# Altium PCB TIDA-010954-RevB.PcbDoc (part 1 of 8)
Units mm, origin at the board's own origin, x right, y up, seen from the top; angles counter-clockwise.
Board outline 290 x 100 mm, 6 copper layers (Top Layer, Mid1, Mid2, Mid3, Mid4, Bottom Layer), stack 1.59 mm thick; 394 components, 204 nets, 1137 pads, 2188 vias.
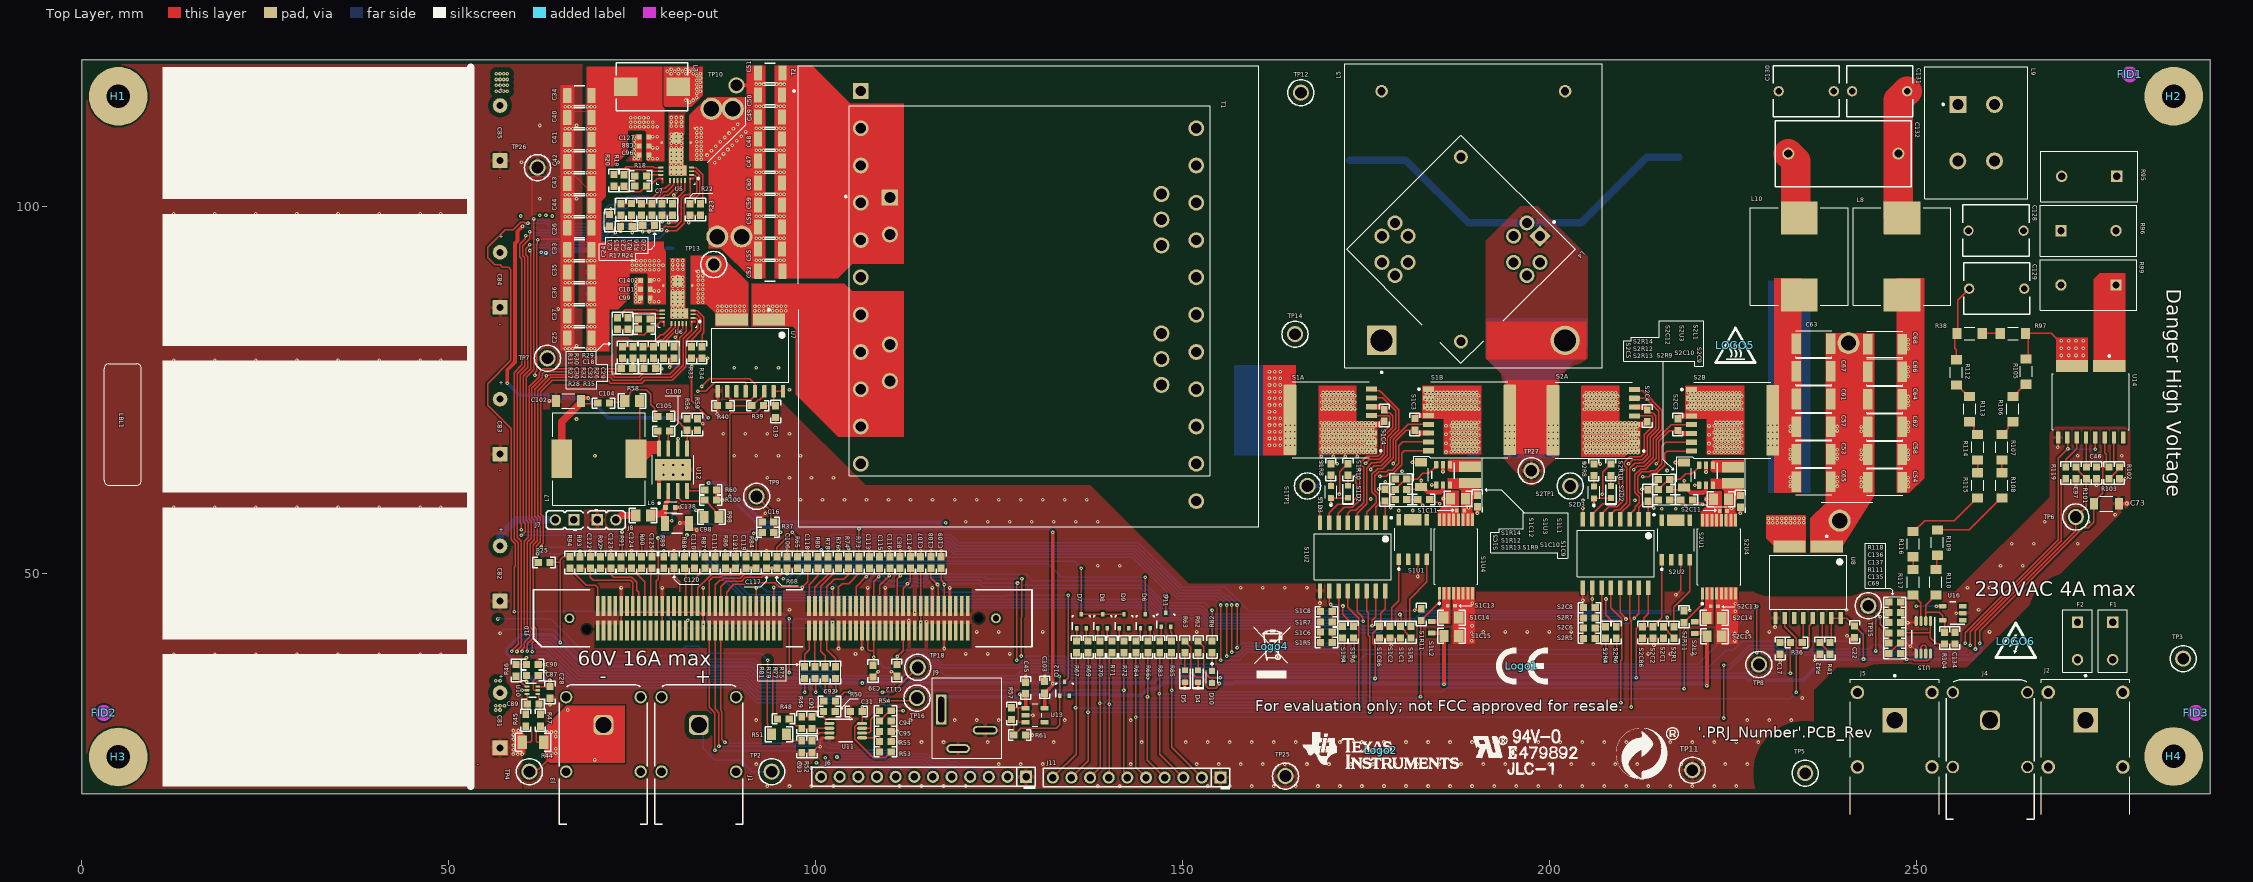
[diagram p0: Top Layer view]
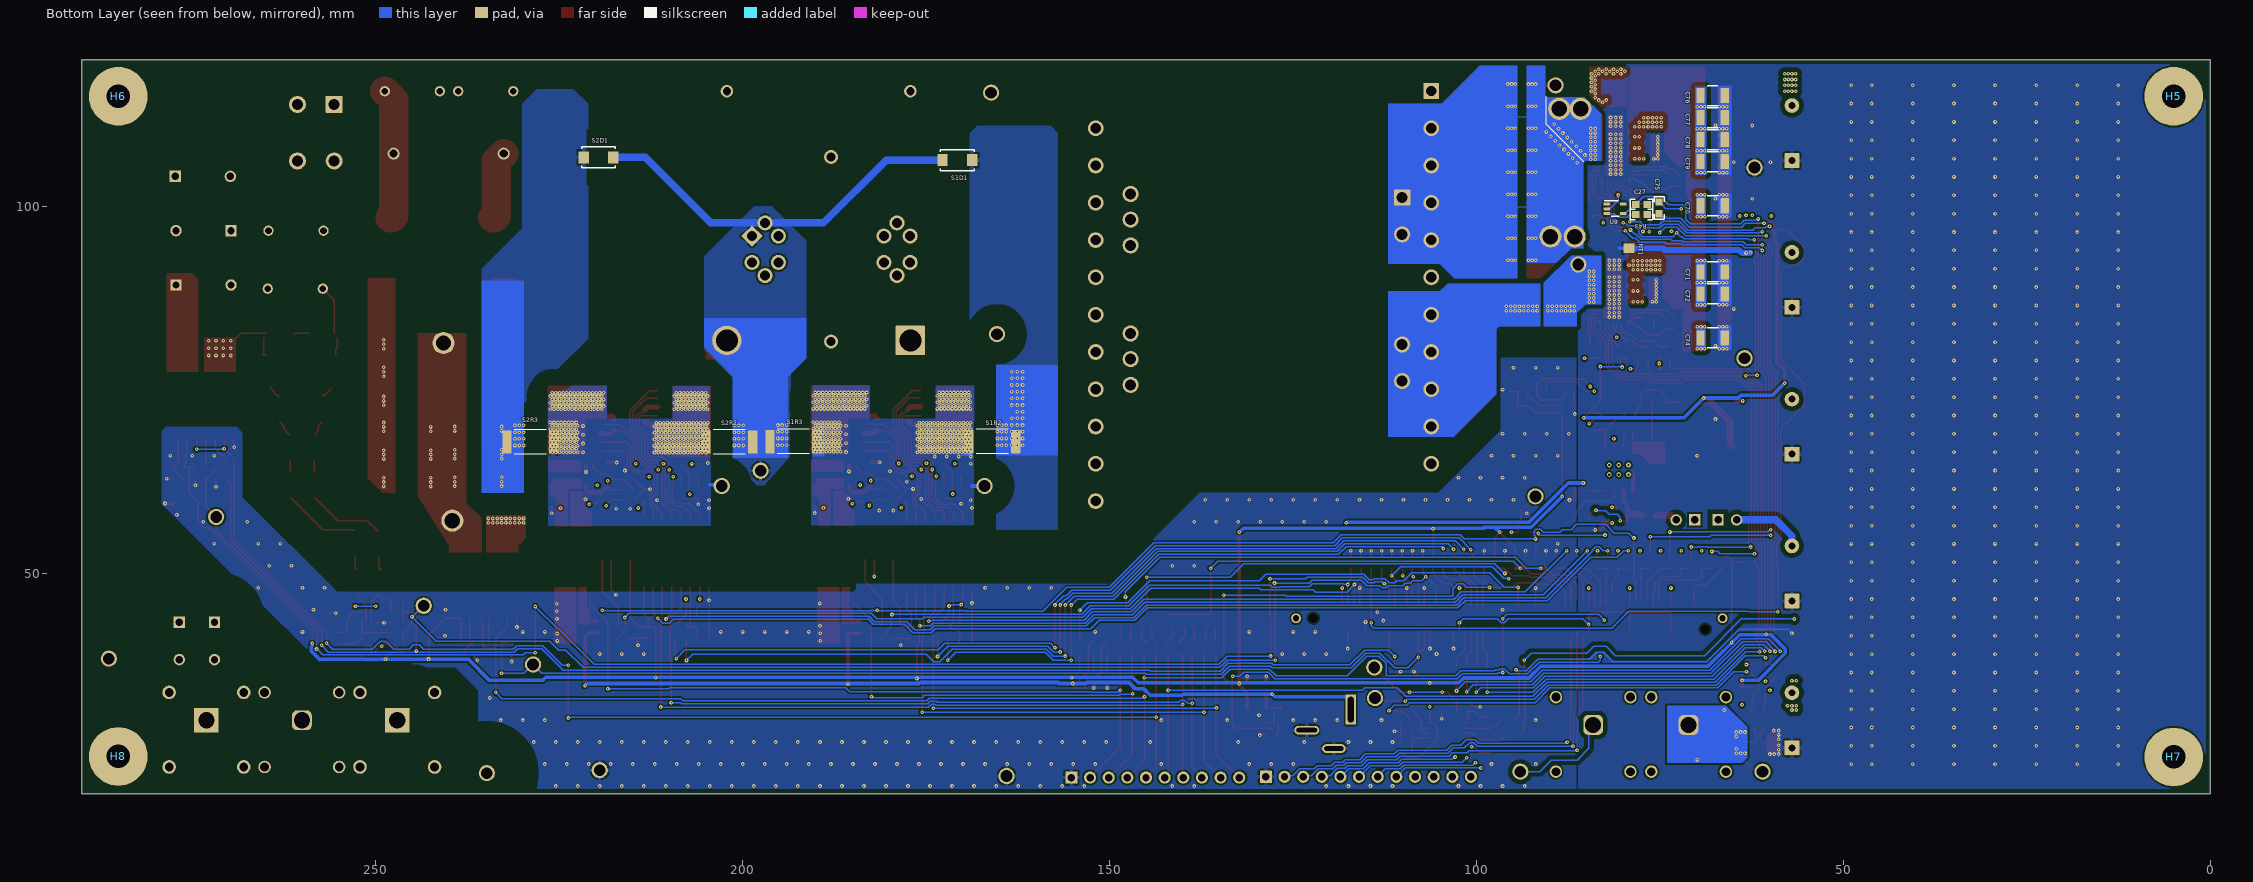
[diagram p1: Bottom Layer view, seen from below]
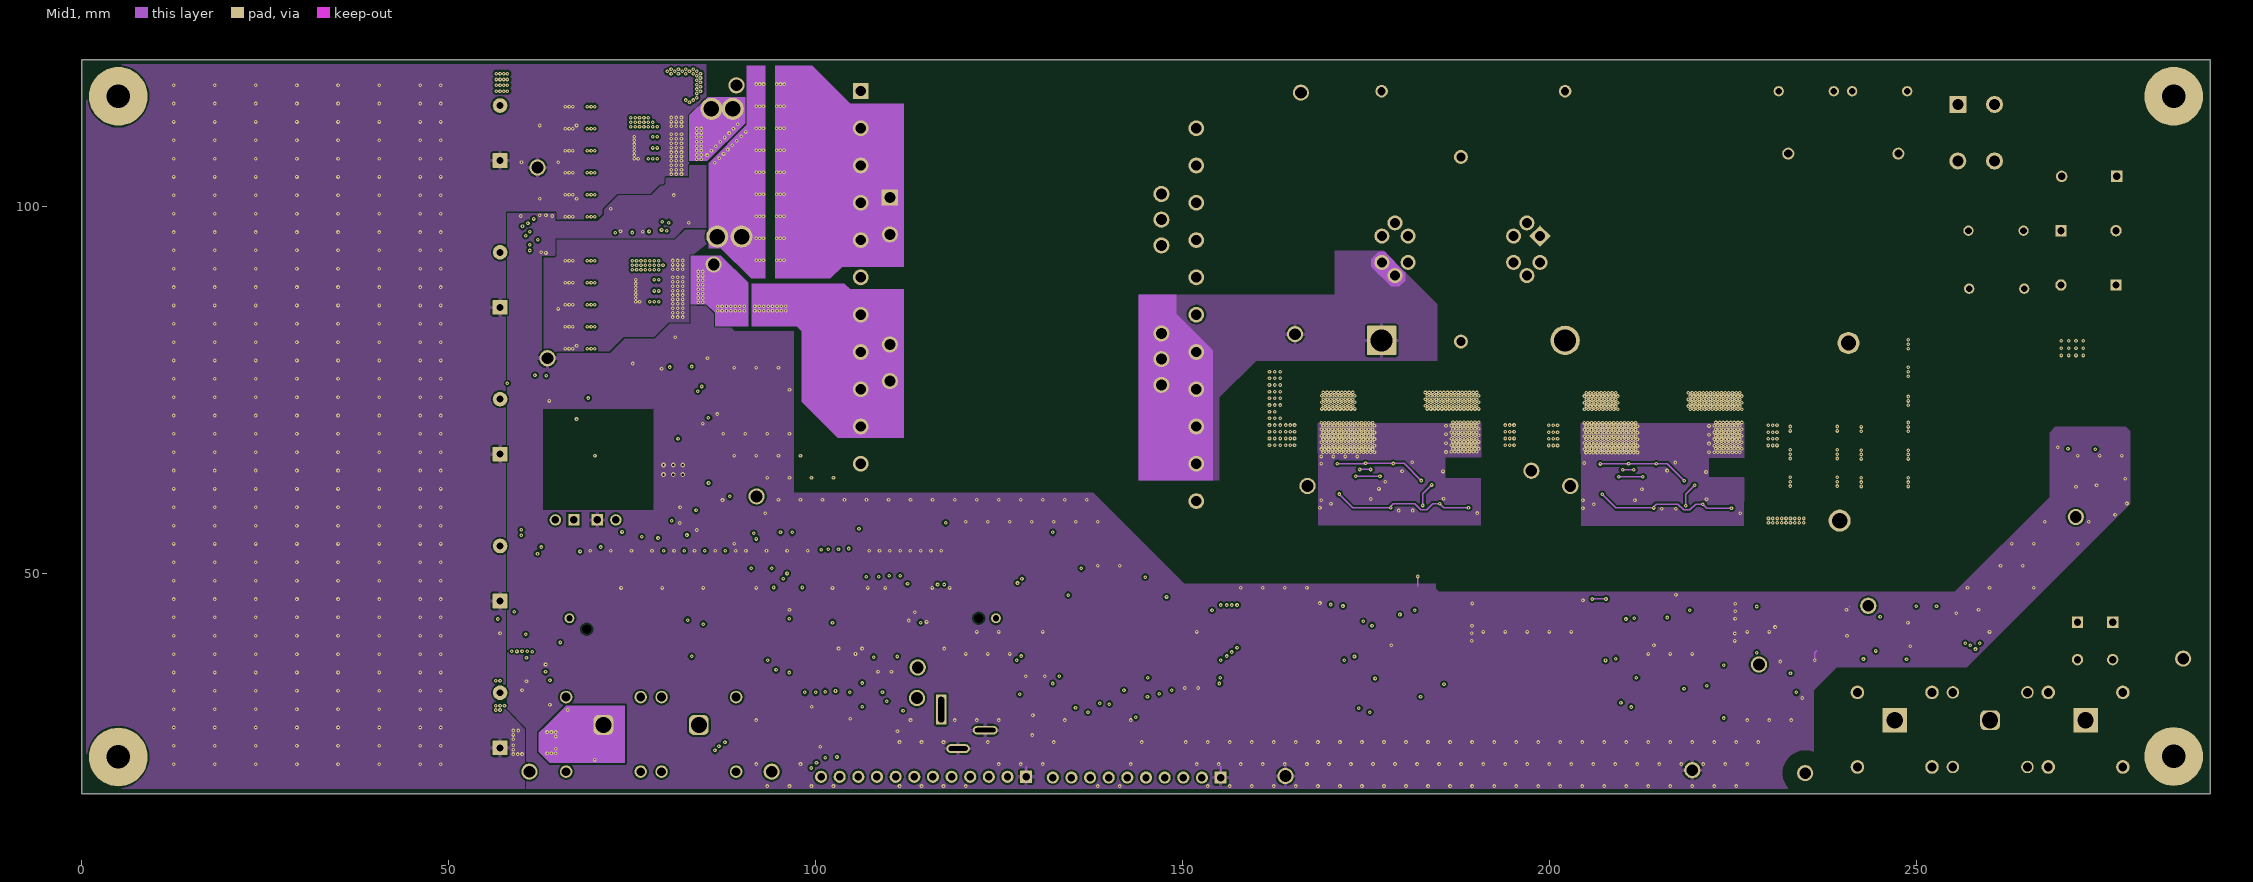
[diagram p2: Mid1]
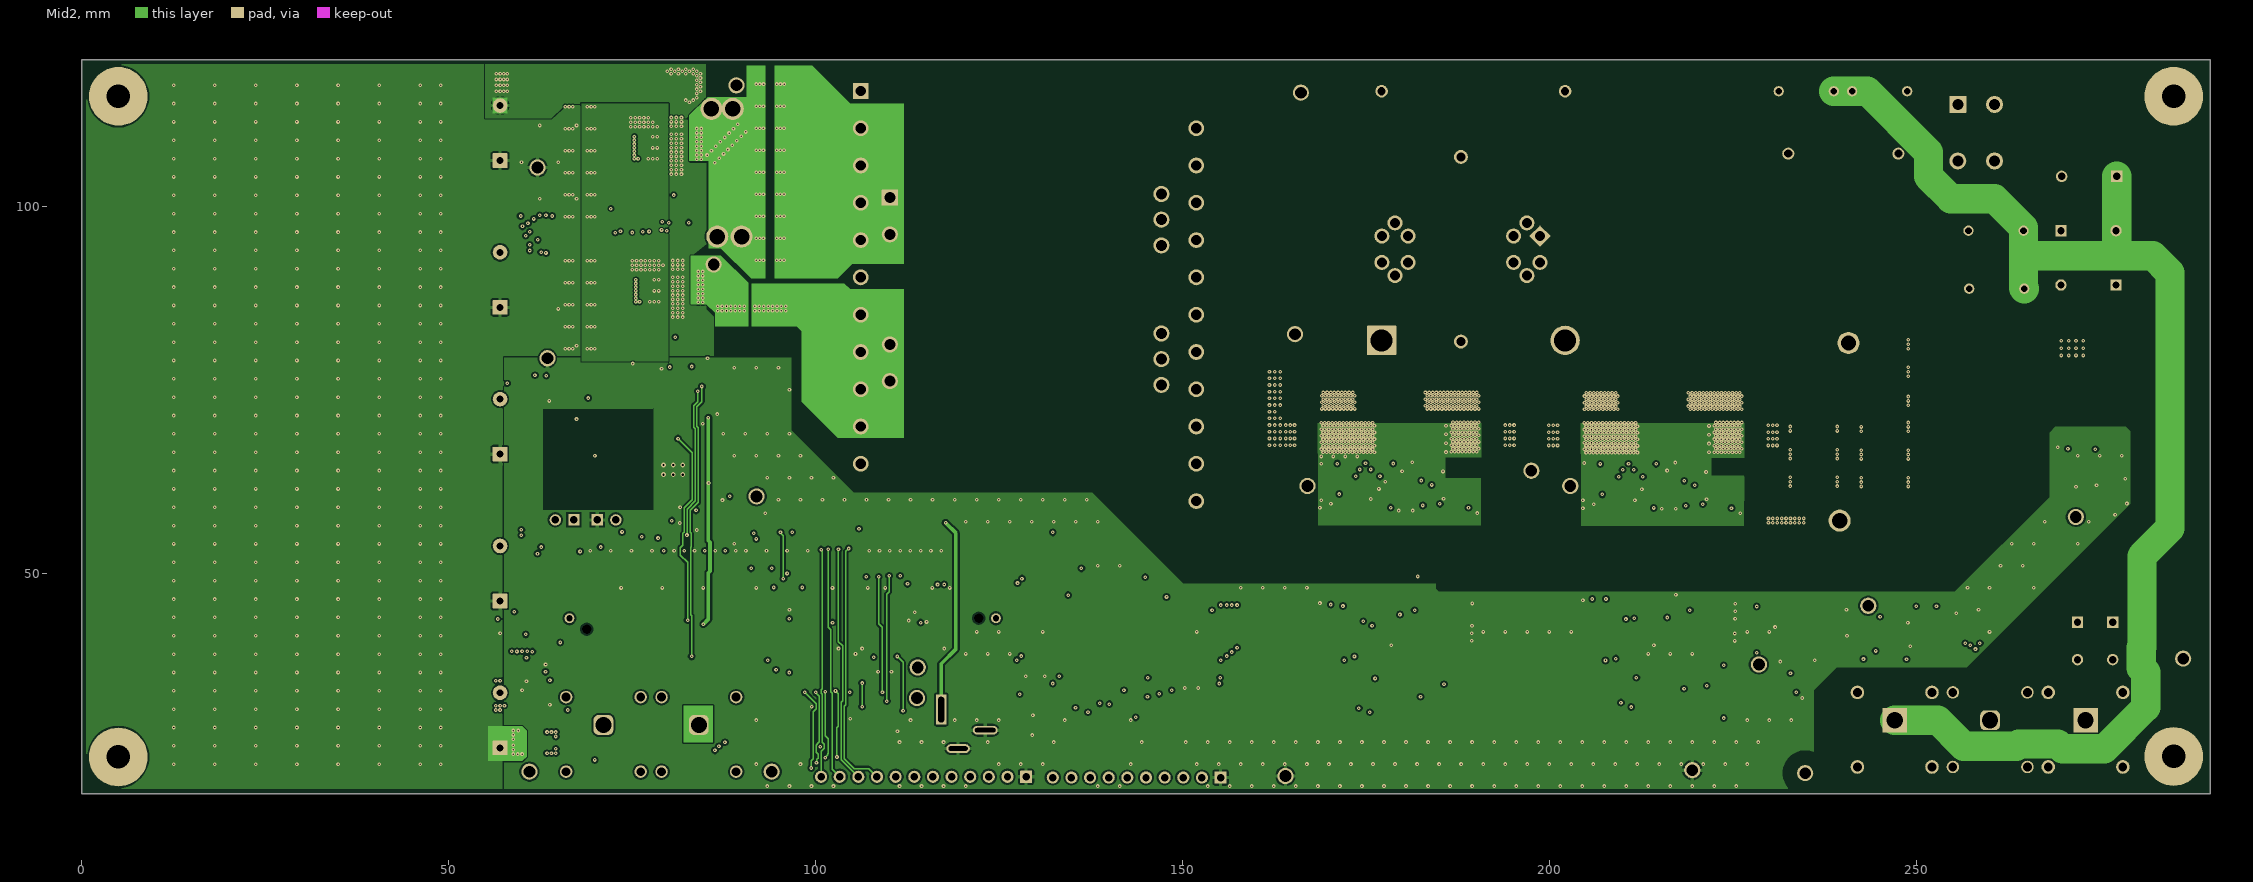
[diagram p3: Mid2]
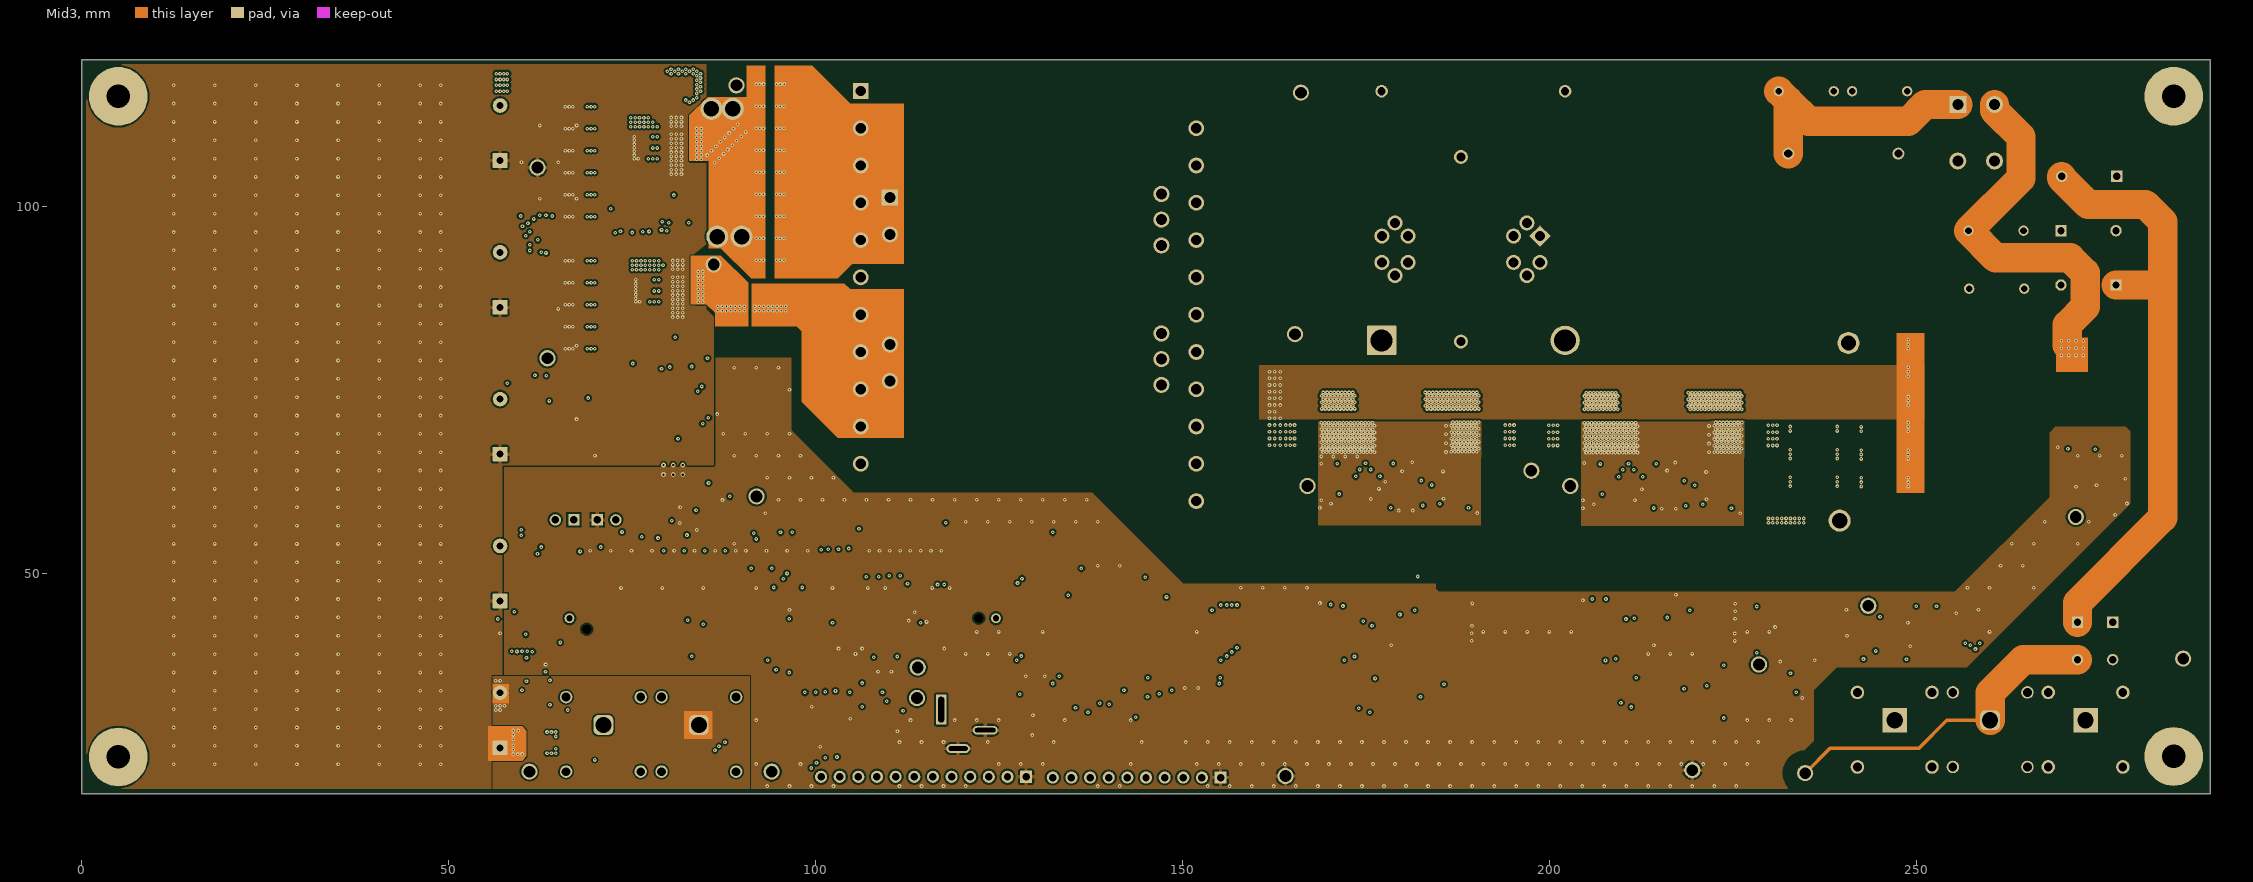
[diagram p4: Mid3]
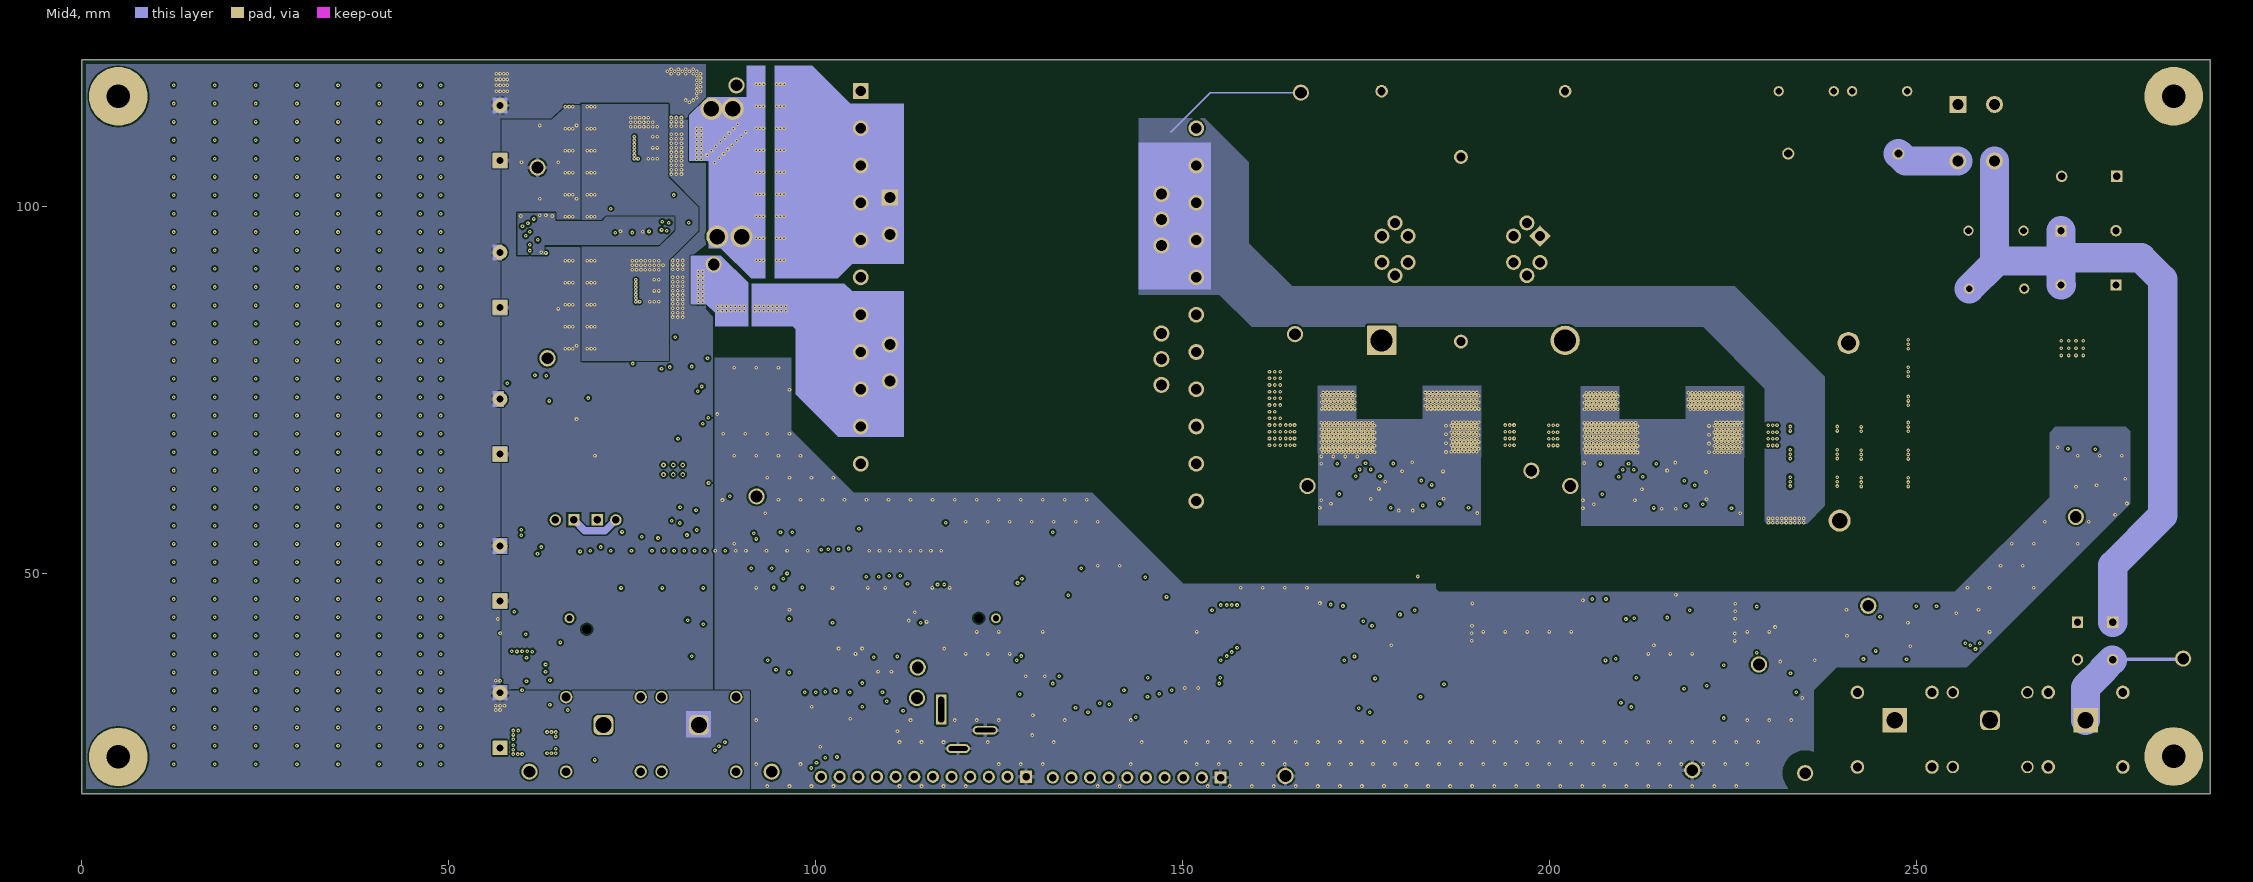
[diagram p5: Mid4]
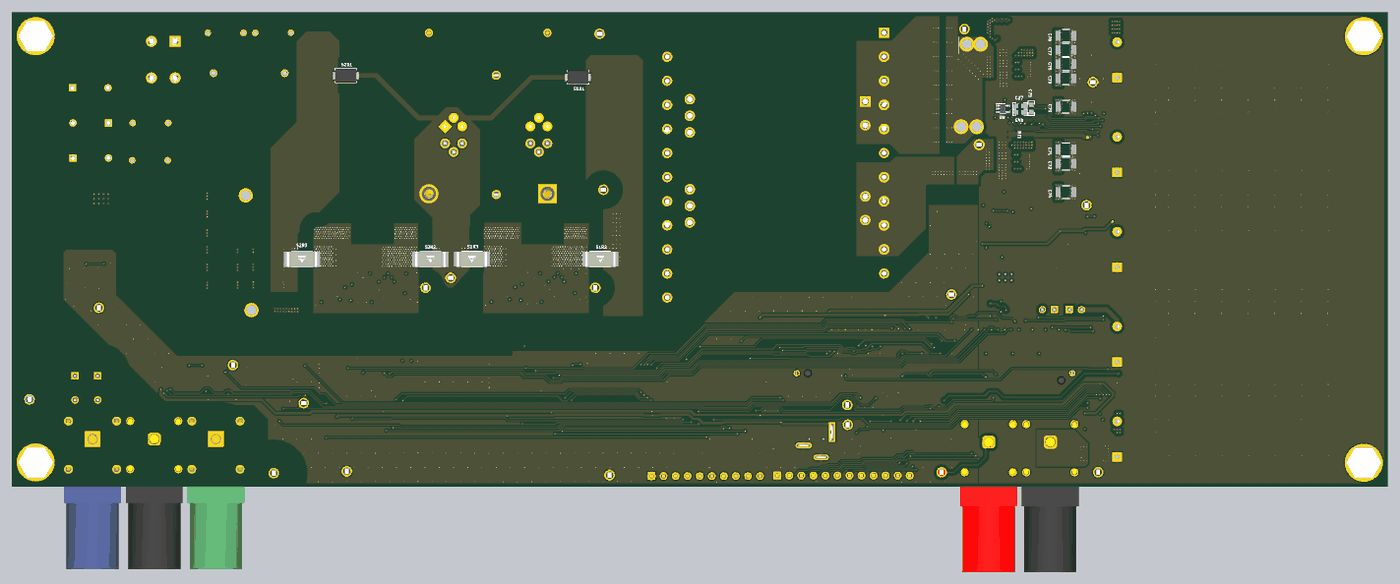
[diagram p11: 3D render of the assembled board from below, using the file's embedded part models]

## Layer stack, top to bottom
Top Solder: solder mask 0.0102, Solder Resist, Dk 3.5
Top Layer: signal copper 0.07
Dielectric 1: prepreg 0.084, PP-010, Dk 4
Dielectric 3: prepreg 0.0535, PP-006, Dk 4.1
Mid1: signal copper 0.061
Core1: core 0.35, Core-032, Dk 4.7
Mid2: signal copper 0.061
Dielectric 5: prepreg 0.0535, PP-006, Dk 4.1
Prepreg: core 0.124, FR-4 High Tg, Dk 4.8
Dielectric 7: prepreg 0.0535, PP-006, Dk 4.1
Mid3: signal copper 0.061
Core2: core 0.35, Core-032, Dk 4.7
Mid4: signal copper 0.061
Dielectric 4: prepreg 0.0535, PP-006, Dk 4.1
Dielectric 2: prepreg 0.084, PP-010, Dk 4
Bottom Layer: signal copper 0.07
Bottom Solder: solder mask 0.0102, Solder Resist, Dk 3.5

## Board outline
0,20 290,20 290,120 0,120

## Design rules (kind name [scope] priority, off if disabled: settings)
AcuteAngle [All] p1: minimum=4.50000000000000E+0001 checktracksonly=FALSE
AssemblyTestPointUsage [All] p1: valid=2
BoardOutlineClearance BoardOutlineClearance_MountingHoles [OnCopper and InComponentClass('Mounting Holes')] p1: gap=0.8 ignorepadtopadclearanceinfootprint=FALSE
BoardOutlineClearance BoardOutlineClearance_Poly [OnCopper and IsPoly] p2: gap=0.635 ignorepadtopadclearanceinfootprint=FALSE
BoardOutlineClearance BoardOutlineClearance_Via [IsVia] p3: gap=0.6 ignorepadtopadclearanceinfootprint=FALSE
BoardOutlineClearance [OnCopper and Not InComponentClass('Logo') and not InComponentClass('FiducialMark') and not InRegion(1000,500,4000,800) and not InPoly] p4: gap=0.8 ignorepadtopadclearanceinfootprint=FALSE
Clearance Clearance_Iso_Int [InNetClass('LV') AND NOT (OnOutside OR OnMultiLayer ) vs NOT InNetClass('LV') AND NOT (OnTopLayer OR OnBottomLayer) AND InAnyNet AND NOT InNetClass('VAC_MEASURE')] p1: gap=2 ignorepadtopadclearanceinfootprint=TRUE
Clearance Clearance_Iso_Ext [InNetClass('LV') AND (OnOutside OR OnMultiLayer) vs NOT InNetClass('LV') AND (OnTopLayer OR OnBottomLayer OR OnMultiLayer) AND InAnyNet AND NOT InNetClass('VAC_MEASURE') AND NOT WithinRoom('SmallerClearance1') AND NOT WithinRoom('SmallerClearance2')] p2: gap=6 ignorepadtopadclearanceinfootprint=TRUE
Clearance Clearance_Keepouts [((IsTrack Or IsArc) And Not InPoly) And IsFree and IsKeepOut vs ((IsTrack Or IsArc) And Not InPoly) And IsFree and IsKeepOut] p3: gap=0 ignorepadtopadclearanceinfootprint=FALSE
Clearance Clearance_S2_Int [InNetClass('S2_Nets') AND NOT InNetClass('LV') AND NOT (OnOutside OR OnMultiLayer ) vs NOT InNetClass('S2_Nets') AND NOT (OnTopLayer OR OnBottomLayer) AND InAnyNet] p4: gap=0.3 ignorepadtopadclearanceinfootprint=TRUE
Clearance Clearance_S1_Int [InNetClass('S1_Nets') AND NOT InNetClass('LV') AND NOT (OnOutside OR OnMultiLayer ) vs NOT InNetClass('S1_Nets') AND NOT (OnTopLayer OR OnBottomLayer) AND InAnyNet] p5: gap=0.3 ignorepadtopadclearanceinfootprint=TRUE
Clearance Clearance_HV_SW3_Int [InNetClass('HV_SW3') AND NOT (OnOutside OR OnMultiLayer ) vs NOT InNetClass('HV_SW3') AND NOT (OnTopLayer OR OnBottomLayer)  AND InAnyNet] p6: gap=0.3 ignorepadtopadclearanceinfootprint=TRUE
Clearance Clearance_HV_SW2_Int [InNetClass('HV_SW2') AND NOT (OnOutside OR OnMultiLayer ) vs NOT InNetClass('HV_SW2') AND NOT (OnTopLayer OR OnBottomLayer) AND InAnyNet] p7: gap=0.3 ignorepadtopadclearanceinfootprint=TRUE
Clearance Clearance_HV_SW1_Int [InNetClass('HV_SW1') AND NOT (OnOutside OR OnMultiLayer ) vs NOT InNetClass('HV_SW1') AND NOT (OnTopLayer OR OnBottomLayer) AND InAnyNet] p8: gap=0.3 ignorepadtopadclearanceinfootprint=TRUE
Clearance Clearance_HV_L_Int [InNetClass('HV_L') AND NOT (OnOutside OR OnMultiLayer ) vs NOT InNetClass('HV_L') AND NOT (OnTopLayer OR OnBottomLayer) AND InAnyNet] p9: gap=0.3 ignorepadtopadclearanceinfootprint=TRUE
Clearance Clearance_HV_N_Int [InNetClass('HV_N') AND NOT (OnOutside OR OnMultiLayer ) vs NOT InNetClass('HV_N') AND NOT (OnTopLayer OR OnBottomLayer) AND InAnyNet] p10: gap=0.3 ignorepadtopadclearanceinfootprint=TRUE
Clearance Clearance_S2_Ext [InNetClass('S2_Nets') AND NOT InNetClass('LV') AND (OnOutside OR OnMultiLayer) vs NOT InNetClass('S2_Nets' ) AND (OnTopLayer OR OnBottomLayer OR OnMultiLayer)  AND InAnyNet] p11: gap=3 ignorepadtopadclearanceinfootprint=TRUE
Clearance Clearance_S1_Ext [InNetClass('S2_Nets') AND NOT InNetClass('LV') AND (OnOutside OR OnMultiLayer) vs NOT InNetClass('S2_Nets') AND (OnTopLayer OR OnBottomLayer OR OnMultiLayer) AND InAnyNet] p12: gap=3 ignorepadtopadclearanceinfootprint=TRUE
Clearance Clearance_HV_SW3_Ext [InNetClass('HV_SW3') AND (OnOutside OR OnMultiLayer) vs NOT InNetClass('HV_SW3') AND (OnTopLayer OR OnBottomLayer OR OnMultiLayer) AND InAnyNet  AND NOT WithinRoom('SmallerClearance4')] p13: gap=3 ignorepadtopadclearanceinfootprint=TRUE
Clearance Clearance_HV_SW2_Ext [InNetClass('HV_SW2') AND (OnOutside OR OnMultiLayer) vs NOT InNetClass('HV_SW2') AND (OnTopLayer OR OnBottomLayer OR OnMultiLayer)  AND InAnyNet] p14: gap=3 ignorepadtopadclearanceinfootprint=TRUE
Clearance Clearance_HV_SW1_Ext [InNetClass('HV_SW1') AND (OnOutside OR OnMultiLayer) vs NOT InNetClass('HV_SW1') AND (OnTopLayer OR OnBottomLayer OR OnMultiLayer) AND InAnyNet] p15: gap=3 ignorepadtopadclearanceinfootprint=TRUE
Clearance Clearance_HV_L_Ext [InNetClass('HV_L') AND (OnOutside OR OnMultiLayer) vs NOT InNetClass('HV_L') AND (OnTopLayer OR OnBottomLayer OR OnMultiLayer) AND InAnyNet AND NOT WithinRoom('SmallerClearance3') AND NOT WithinRoom('SmallerClearance4')] p16: gap=3 ignorepadtopadclearanceinfootprint=TRUE
Clearance Clearance_HV_N_Ext [InNetClass('HV_N') AND (OnOutside OR OnMultiLayer) vs NOT InNetClass('HV_N') AND (OnTopLayer OR OnBottomLayer OR OnMultiLayer) AND InAnyNet AND NOT WithinRoom('SmallerClearance3') AND NOT WithinRoom('SmallerClearance4')] p17: gap=3 ignorepadtopadclearanceinfootprint=TRUE
Clearance Clearance_MidV1_Int [InNetClass('MidV1') AND NOT (OnOutside OR OnMultiLayer ) vs NOT InNetClass('MidV1') AND NOT (OnTopLayer OR OnBottomLayer)] p18: gap=0.2 ignorepadtopadclearanceinfootprint=TRUE
Clearance Clearance_MidV2_Int [InNetClass('MidV2') AND NOT (OnOutside OR OnMultiLayer ) vs NOT InNetClass('MidV2') AND NOT (OnTopLayer OR OnBottomLayer)] p19: gap=0.2 ignorepadtopadclearanceinfootprint=TRUE
Clearance Clearance_MidV3_Int [InNetClass('MidV3') AND NOT (OnOutside OR OnMultiLayer ) vs NOT InNetClass('MidV3') AND NOT (OnTopLayer OR OnBottomLayer)] p20: gap=0.2 ignorepadtopadclearanceinfootprint=TRUE
Clearance Clearance_MidV4_Int [InNetClass('MidV4') AND NOT (OnOutside OR OnMultiLayer ) vs NOT InNetClass('MidV4') AND NOT (OnTopLayer OR OnBottomLayer)] p21: gap=0.2 ignorepadtopadclearanceinfootprint=TRUE
Clearance Clearance_MidV1_Ext [InNetClass('MidV1') AND (OnOutside OR OnMultiLayer) vs NOT InNetClass('MidV1' ) AND (OnTopLayer OR OnBottomLayer OR OnMultiLayer)] p22: gap=0.6 ignorepadtopadclearanceinfootprint=TRUE
Clearance Clearance_MidV2_Ext [InNetClass('MidV2') AND (OnOutside OR OnMultiLayer) vs NOT InNetClass('MidV2' ) AND (OnTopLayer OR OnBottomLayer OR OnMultiLayer)] p23: gap=0.6 ignorepadtopadclearanceinfootprint=TRUE
Clearance Clearance_MidV3_Ext [InNetClass('MidV3') AND (OnOutside OR OnMultiLayer) vs NOT InNetClass('MidV3' ) AND (OnTopLayer OR OnBottomLayer OR OnMultiLayer)] p24: gap=0.6 ignorepadtopadclearanceinfootprint=TRUE
Clearance Clearance_MidV4_Ext [InNetClass('MidV4') AND (OnOutside OR OnMultiLayer) vs NOT InNetClass('MidV4' ) AND (OnTopLayer OR OnBottomLayer OR OnMultiLayer)] p25: gap=0.6 ignorepadtopadclearanceinfootprint=TRUE
Clearance Clearance_Poly [InPolygon] p26: gap=0.25 ignorepadtopadclearanceinfootprint=TRUE
Clearance Clearance_FiducialMark [IsKeepOut and InComponentClass('FiducialMark') vs IsPad and InComponentClass('FiducialMark')] p27: gap=0 ignorepadtopadclearanceinfootprint=FALSE
Clearance Clearance_Int [NOT (OnOutside OR OnMultiLayer)] p28: gap=0.2 ignorepadtopadclearanceinfootprint=TRUE
Clearance Clearance_Ext [All] p29: gap=0.2 ignorepadtopadclearanceinfootprint=TRUE
Clearance [All] p30: gap=0.2 ignorepadtopadclearanceinfootprint=TRUE
ComponentClearance ComponentClearance_Magnetics [InComponent('T1') OR InComponent('T2') vs InComponent('T1') OR InComponent('T2')] p1: gap=-100 collisioncheckmode=3 verticalgap=0.254 showdistances=FALSE
ComponentClearance ComponentClearance_Magnetics_2 [InComponent('L4') OR InComponent('L5') vs InComponent('L4') OR InComponent('L5')] p2: gap=-100 collisioncheckmode=3 verticalgap=0.254 showdistances=FALSE
ComponentClearance ComponentClearance_MountingHoles_FiducialMarks [InComponentClass('Mounting Holes') vs InComponentClass('FiducialMark')] p3: gap=1.27 collisioncheckmode=3 verticalgap=0.254 showdistances=FALSE
ComponentClearance ComponentClearance_Shunt [InComponentClass('Header') vs InComponentClass('Shunt')] p4: gap=0 collisioncheckmode=3 verticalgap=0 showdistances=FALSE
ComponentClearance ComponentClearance_Logo [InComponentClass('Logo')] p5: gap=0.762 collisioncheckmode=3 verticalgap=0.254 showdistances=FALSE
ComponentClearance ComponentClearance_ScrewToNut [(HasFootprint('NY PMS 440 0025 PH')) vs (HasFootprint('Keystone_1902C'))] p6: gap=0.127 collisioncheckmode=3 verticalgap=0.254 showdistances=FALSE
ComponentClearance ComponentClearance_MountingHoles [InComponentClass('Mounting Holes')] p7: gap=2.54 collisioncheckmode=3 verticalgap=2540 showdistances=FALSE
ComponentClearance ComponentClearance_SmallPassives [HasFootprint('0201*') or HasFootprint('0402*') or HasFootprint('0508') or HasFootprint('*0603*') or HasFootprint('0612') or HasFootprint('0805*') or HasFootprint('0815*') or HasFootprint('0830*') or HasFootprint('1206*') or HasFootprint('1210*') or HasFootprint('1808*') or HasFootprint('1812*') or HasFootprint('1825*') or HasFootprint('2010*') or HasFootprint('2220*') or HasFootprint('2225*') or HasFootprint('2512*') or HasFootprint('2728*') or HasFootprint('3518*') vs HasFootprint('0201*') or HasFootprint('0402*') or HasFootprint('0508') or HasFootprint('*0603*') or HasFootprint('0612') or HasFootprint('0805*') or HasFootprint('0815*') or HasFootprint('0830*') or HasFootprint('1206*') or HasFootprint('1210*') or HasFootprint('1808*') or HasFootprint('1812*') or HasFootprint('1825*') or HasFootprint('2010*') or HasFootprint('2220*') or HasFootprint('2225*') or HasFootprint('2512*') or HasFootprint('2728*') or HasFootprint('3518*')] p8: gap=0.38 collisioncheckmode=3 verticalgap=0.254 showdistances=FALSE
ComponentClearance ComponentClearance_THtoSMT [IsThruComponent vs IsSMTComponent] p9: gap=0.762 collisioncheckmode=3 verticalgap=0.762 showdistances=FALSE
ComponentClearance ComponentClearance_THtoTH [IsThruComponent vs IsThruComponent] p10: gap=0.508 collisioncheckmode=3 verticalgap=0.762 showdistances=FALSE
ComponentClearance [All] p11: gap=0.5 collisioncheckmode=3 verticalgap=0.254 showdistances=FALSE
DiffPairsRouting [All] p1: maxlimit=2.54 minlimit=0.254 mostfreqgap=0.254 toplayer_minwidth=0.381 toplayer_maxwidth=0.381 toplayer_prefwidth=0.381 midlayer1_minwidth=0.381 midlayer1_maxwidth=0.381 midlayer1_prefwidth=0.381 midlayer2_minwidth=0.381 midlayer2_maxwidth=0.381 midlayer2_prefwidth=0.381 midlayer3_minwidth=0.381 midlayer3_maxwidth=0.381 midlayer3_prefwidth=0.381 midlayer4_minwidth=0.381 midlayer4_maxwidth=0.381 midlayer4_prefwidth=0.381 bottomlayer_minwidth=0.381 bottomlayer_maxwidth=0.381 bottomlayer_prefwidth=0.381 maxuncoupledlength=25.4
FabricationTestPointUsage TestPointUsage [All] p1: valid=2 allowmultiple=FALSE
FabricationTestpoint Testpoint [All] p1: side=3 testpointundercomponent=TRUE minsize=1.016 maxsize=2.54 preferedsize=1.524 minholesize=0 maxholesize=1.016 preferedholesize=0.813 testpointgrid=0.025 allowsidetop=TRUE allowsidebottom=TRUE usegrid=TRUE gridtolerance=0
FanoutControl Fanout_LCC [IsLCC] p1: bgadir=Out bgaviamode=Centered fanoutstyle=Auto fanoutdirection=Alternating viagrid=0.025 // Fanout_LCC (Default Rule)
FanoutControl Fanout_BGA [IsBGA] p2: bgadir=Out bgaviamode=Centered fanoutstyle=Auto fanoutdirection=Alternating viagrid=0.025 // Fanout_BGA (Default Rule)
FanoutControl Fanout_Default [All] p4: bgadir=Out bgaviamode=Centered fanoutstyle=Auto fanoutdirection=Alternating viagrid=0.025 // Fanout_Default (Default Rule)
FanoutControl Fanout_Small [(CompPinCount < 5)] p5: bgadir=Out bgaviamode=Centered fanoutstyle=Auto fanoutdirection=OutThenIn viagrid=0.025 // Fanout_Small (Default Rule)
Height [All] p1 off: minheight=0 maxheight=25.4 prefheight=12.7
HoleSize [All] p1: absolutevalues=TRUE maxlimit=6.375 minlimit=0.2 maxpercent=80.000 minpercent=20.000
MinimumAnnularRing MinimumAnnularRing_ThermalPadVias [IsVia and InAnyComponent] p1: minimumring=0.15
MinimumAnnularRing MinimumAnnularRing_Vias [IsVia] p2: minimumring=0.15
MinimumAnnularRing [All] p3: minimumring=0.2
MinimumSolderMaskSliver MinimumSolderMaskSliver_Logo [InComponentClass('Logo') vs InComponentClass('Logo')] p1: minsoldermaskwidth=0.018
MinimumSolderMaskSliver [All] p2: minsoldermaskwidth=0.1
PlaneConnect [All] p1: pad.planeconnectstyle=Relief pad.reliefexpansion=0.254 pad.reliefentries=4 pad.reliefconductorwidth=0.5 pad.reliefairgap=0.254 via.planeconnectstyle=Relief via.reliefexpansion=0.254 via.reliefentries=4 via.reliefconductorwidth=0.254 via.reliefairgap=0.254
PolygonConnect [All] p1: thpad.connectstyle=Relief thpad.reliefconductorwidth=0.5 thpad.reliefentries=4 thpad.polygonreliefangle="90 Angle" thpad.airgapwidth=0.254 smdpad.connectstyle=Relief smdpad.reliefconductorwidth=0.5 smdpad.reliefentries=4 smdpad.polygonreliefangle="90 Angle" smdpad.airgapwidth=0.254 via.connectstyle=Direct via.reliefconductorwidth=0.254 via.reliefentries=4 via.polygonreliefangle="90 Angle" via.airgapwidth=0.254
RoomDefinition SmallerClearance1 [InComponentClass('FiducialMark')] p1 off: confinementstyle=ConfineIn formatcopy=TRUE lockcomponents=FALSE outline 190.8,63.254 173.2,63.254 173.2,45.646 190.8,45.646
RoomDefinition SmallerClearance3 [InComponentClass('Logo')] p2 off: confinementstyle=ConfineIn formatcopy=TRUE lockcomponents=FALSE outline 253.2,84.3 269.2,84.3 269.2,80.9 253.2,80.9
RoomDefinition SmallerClearance2 [InComponentClass('Mounting Holes')] p3 off: confinementstyle=ConfineIn formatcopy=TRUE lockcomponents=FALSE outline 226.6,63.208 209,63.208 209,45.6 226.6,45.6
RoomDefinition SmallerClearance4 [False] p4 off: confinementstyle=ConfineIn formatcopy=TRUE lockcomponents=FALSE outline 223.2,110.5 166.8,110.5 166.8,102.8 223.2,102.8
RoomDefinition S2 [InComponentClass('S2')] p5 off: confinementstyle=ConfineIn formatcopy=TRUE lockcomponents=FALSE outline 197.4,81 197.4,38 233.2,38 233.2,81
RoomDefinition S1 [InComponentClass('S1')] p6 off: confinementstyle=ConfineIn formatcopy=TRUE lockcomponents=FALSE outline 161.572,81.046 161.572,37.7 197.372,37.7 197.372,81.046
RoutingVias ThermalPadVias [IsVia and InAnyComponent] p1: holewidth=0.2 width=0.5 viastyle="Through Hole" minholewidth=0.2 minwidth=0.5 maxholewidth=0.5 maxwidth=0.8
RoutingVias [All] p2: holewidth=0.2 width=0.5 viastyle="Through Hole" minholewidth=0.2 minwidth=0.5 maxholewidth=1.016 maxwidth=1.651
SilkToBoardRegionClearance [Not ((IsComment or IsDesignator) And (Hide <> 'False')) and not InRegion(1000,500,4000,800)] p1:
SilkToSilkClearance SilkToSilkClearance_Pb-FreeLogo [(HasFootprint('Pb-Free_Overlay_Medium') OR HasFootprint('Pb-Free_Overlay_Small')) vs (HasFootprint('Pb-Free_Overlay_Medium') OR HasFootprint('Pb-Free_Overlay_Small'))] p1: silktosilkclearance=0
SilkToSilkClearance [All] p2: silktosilkclearance=0.1
SilkToSolderMaskClearance SilkToComponentPadClearance [(IsPad or IsFill or IsRegion) and InAnycomponent] p1: minsilkscreentomaskgap=0.1 clearancetoexposedcopper=TRUE
SilkToSolderMaskClearance "Silk to Solder Mask Opening" [All] p2: minsilkscreentomaskgap=0.1 clearancetoexposedcopper=FALSE
SolderMaskExpansion [All] p1: expansion=0.05 istentingtop=FALSE
SupplyNets "Schematic Supply Nets_4" [InNet('3V3')] p1: voltage=0.000
SupplyNets "Schematic Supply Nets_3" [InNet('GND')] p2: voltage=0.000
SupplyNets "Schematic Supply Nets_2" [InNet('PE')] p3: voltage=0.000
SupplyNets "Schematic Supply Nets_1" [InNet('5V')] p4: voltage=0.000
SupplyNets "Schematic Supply Nets" [InNet('PGND')] p5: voltage=0.000
UnRoutedNet [All] p1: checkbadconnections=TRUE
Width [All] p1: maxlimit=5 minlimit=0.2 preferedwidth=0.25
13 further rules are at their usual default settings.

## Classes and differential pairs
net class VAC_MEASURE: NetR105_2 NetR106_2 NetR107_2 NetR108_2 NetR109_2 NetR112_2 NetR113_2 NetR114_2 NetR115_2 NetR116_2
net class HV_SW1: T1_3
net class MidV3: DAB_POWER NetC98_2 NetC100_1 NetC100_2 NetJ7_1 PVIN
net class MidV1: LEG1_HS NetC7_1 NetR18_2 NetR19_1 NetR20_1 SW_L1 T1_1
net class MidV2: LEG2_HS NetC18_1 NetR29_2 NetR30_1 NetR31_1 SW_L2 T1_2
net class S2_Nets: NetS2C6_1 NetS2C8_1 NetS2C13_2 NetS2D2_1 NetS2D3_2 NetS2L1_1 NetS2R1_1 NetS2R9_1 NetS2R12_1 NetS2U1_2 NetS2U1_5 NetS2U1_6 NetS2U1_7 S2S_5V S2S_10V S2S_SRC S2SA_FLT S2SA_IN S2SA_Z S2SB_FLT S2SB_IN S2SB_Z
net class S1_Nets: NetS1C6_1 NetS1C8_1 NetS1C13_2 NetS1D2_1 NetS1D3_2 NetS1L1_1 NetS1R1_1 NetS1R9_1 NetS1R12_1 NetS1U1_2 NetS1U1_5 NetS1U1_6 NetS1U1_7 S1S_5V S1S_10V S1S_SRC S1SA_FLT S1SA_IN S1SA_Z S1SB_FLT S1SB_IN S1SB_Z
component class Output: C46 C69 C73 C97 C128 C129 C130 C131 C132 C134 C135 C136 C137 F1 F2 L8 L9 L10 R38 R95 R96 R97 R99 R101 R102 R103 R104 R105 R106 R107 R108 R109 R110 R111 R112 R113 R114 R115 R116 R117 R118 R119 TP6 TP11 TP15 U14 U15 U16
channel class TIDA-010954-ACSwitch: S1 S2
net class SW_SRC: NetD10_S1_1 NetD10_S2_1 NetR93_S1_1 NetR93_S2_1 NetS1D2_1 NetS1D3_2 NetS1L1_1 NetS1R9_1 NetS1R12_1 NetS2D2_1 NetS2D3_2 NetS2L1_1 NetS2R9_1 NetS2R12_1 NetU11_S1_5 NetU11_S1_6 NetU11_S1_7 NetU11_S2_5 NetU11_S2_6 NetU11_S2_7 S1S_5V S1S_10V S1S_SRC S1SA_FLT S1SA_IN S1SA_Z S1SB_FLT S1SB_IN S1SB_Z S2S_5V S2S_10V S2S_SRC S2SA_FLT S2SA_IN S2SA_Z S2SB_FLT S2SB_IN S2SB_Z
net class PE: PE
net class LV: 3V3 5V 5V_FLT 5V_GOOD AC_CS AC_CS_FLT AC_VS CS_FLT DAB_POWER DC_CS DC_VS F\A\U\L\T\ FB_TMP GND GPIO_DEBUG1 GPIO_DEBUG2 GPIO_DEBUG3 GPIO_WIRELESS1 GPIO_WIRELESS2 LED_RED LEG1_HS LEG2_HS NetC7_1 NetC18_1 NetC21_1 NetC23_1 NetC30_1 NetC32_1 NetC89_1 NetC89_2 NetC91_1 NetC91_2 NetC93_2 NetC95_2 NetC98_2 NetC100_1 NetC100_2 NetC104_2 NetC105_2 NetC110_1 NetC111_1 NetC120_1 NetC121_1 NetC122_1 NetC123_1 NetC124_1 NetC125_1 NetC134_1 NetC134_2 NetC136_1 NetD4_1 NetD5_1 NetD6_1 NetD6_2 NetD7_1 NetD7_2 NetD8_1 NetD8_2 NetD9_1 NetD10_1 NetD11_1 NetD11_2 NetJ7_1 NetJ10_1 NetJ10_2 NetJ10_3 NetJ10_4 NetJ10_5 NetJ10_6 NetJ10_8 NetJ10_12 NetJ10_14 NetJ10_15 NetJ10_18 NetJ10_20 NetJ10_21 NetJ10_26 NetJ10_27 NetJ10_28 NetJ10_30 NetJ10_32 NetJ10_37 NetJ10_40 NetJ10_41 NetJ10_42 NetJ10_43 NetJ10_44 NetJ10_45 NetJ10_49 NetJ10_50 NetJ10_51 NetJ10_52 NetJ10_53 NetJ10_54 NetJ10_55 NetJ10_56 NetJ10_57 NetJ10_58 NetJ10_60 NetJ10_61 NetJ10_62 NetJ10_63 NetJ10_64 NetJ10_66 NetJ10_67 NetJ10_68 NetJ10_69 NetJ10_70 NetJ10_71 NetJ10_72 NetJ10_73 NetJ10_74 NetJ10_76 NetJ10_86 NetJ10_88 NetJ10_90 NetJ10_92 NetJ10_93 NetJ10_95 NetJ10_109 NetJ10_113 NetJ10_114 NetJ10_115 NetJ10_116 NetJ10_117 NetJ10_118 NetJ10_119 NetJ10_120 NetJ12_1 NetJ13_3 NetJ13_4 NetJ13_8 NetR16_2 NetR18_2 NetR19_1 NetR20_1 NetR22_1 NetR23_1 NetR26_2 NetR29_2 NetR30_1 NetR31_1 NetR33_1 NetR34_1 NetR36_1 NetR37_1 NetR39_2 NetR41_2 NetR43_2 NetR46_2 NetR54_2 NetR60_2 NetR98_1 NetR101_2 NetR102_2 NetS1C6_1 NetS1C8_1 NetS1C13_2 NetS1R1_1 NetS2C6_1 NetS2C8_1 NetS2C13_2 NetS2R1_1 NetU4_2 NetU4_5 NetU15_6 PGND PRI_CS PVIN PVRTN PWR_FLT Q1_G Q1_ZVD Q2_G Q2_ZVD Q3_G Q3_ZVD Q4_G Q4_ZVD REF REF_TMCS S1_PWR_FLT S1_TMP S1A_FLT S1A_G S1A_ZVD S1B_FLT S1B_G S1B_ZVD S2_PWR_FLT S2_TMP S2A_FLT S2A_G S2A_ZVD S2B_FLT S2B_G S2B_ZVD S_PWR SEC_CS SPI_CLK SPI_COMM_CS SPI_MISO SPI_MOSI SW_L1 SW_L2 SWITCH_FLT T1_1 T1_2 UART_RX UART_TX XFMR_CS_FLT
net class HV: L_EXT N_EXT
net class HV_SW2: MidHV T1_4
net class HV_SW3: S2DA
net class HV_N: N_M NetC130_2 NetF2_1 S2DB
net class HV_L: L_M NetC131_1 S1DA
component class TIDA-010954-Top: J1 J2 J3 J4 J5 TP2 TP3 TP4 TP5
component class S2: S2A S2B S2C1 S2C2 S2C3 S2C4 S2C5 S2C6 S2C8 S2C9 S2C10 S2C11 S2C12 S2C13 S2C14 S2C15 S2C86 S2D1 S2D2 S2D3 S2L1 S2L2 S2R1 S2R2 S2R3 S2R4 S2R5 S2R6 S2R7 S2R8 S2R9 S2R10 S2R11 S2R12 S2R13 S2R14 S2TP1 S2U1 S2U2 S2U3 S2U4
component class S1: S1A S1B S1C1 S1C2 S1C3 S1C4 S1C5 S1C6 S1C8 S1C9 S1C10 S1C11 S1C12 S1C13 S1C14 S1C15 S1C86 S1D1 S1D2 S1D3 S1L1 S1L2 S1R1 S1R2 S1R3 S1R4 S1R5 S1R6 S1R7 S1R8 S1R9 S1R10 S1R11 S1R12 S1R13 S1R14 S1TP1 S1U1 S1U2 S1U3 S1U4
component class FB: C7 C18 C20 C21 C23 C24 C29 C30 C32 C88 C96 C99 C101 C127 C140 R15 R16 R17 R18 R19 R20 R21 R22 R23 R24 R25 R26 R27 R28 R29 R30 R31 R32 R33 R34 R35 U5 U6
component class Input: C28 C31 C81 C82 C83 C84 C85 C87 C89 C90 C91 C92 C93 C94 C95 R44 R45 R46 R47 R48 R49 R50 R51 R52 R53 R54 R55 TP16 TP18 U10 U11
component class Header: J6 J7 J8 J11
component class Power: C45 C98 C100 C102 C103 C104 C105 C138 D4 D5 J7 J8 J9 L6 L7 R56 R57 R58 R59 R60 R61 R62 R63 R98 R100 U12 U13
component class Cycloconverter: C16 C17 C19 C22 C25 C26 C27 C33 C34 C35 C36 C37 C40 C41 C42 C43 C44 C47 C48 C49 C50 C51 C52 C53 C54 C55 C56 C57 C58 C59 C60 C61 C62 C63 C64 C65 C66 C67 C68 C70 C71 C72 C74 C75 C76 C77 C78 C79 L3 L4 L5 NT1 R36 R37 R39 R40 R41 R42 R43 T1 T2 TP8 TP9 TP10 TP12 TP13 TP14 TP26 TP27 U7 U8 U9
component class Control: C38 C39 C106 C107 C108 C109 C110 C111 C112 C113 C114 C115 C116 C117 C118 C119 C120 C121 C122 C123 C124 C125 D6 D7 D8 D9 D10 D11 D12 J6 J10 J11 R64 R65 R66 R67 R68 R69 R70 R71 R72 R73 R74 R75 R76 R77 R78 R79 R80 R81 R82 R83 R84 R85 R86 R87 R88 R89 R90 R91 R92 R93 R94 TP7 TP25
component class "Mounting Holes": H1 H2 H3 H4
component class Logo: Logo2
component class HW: FID1 FID2 FID3 H1 H2 H3 H4 H5 H6 H7 H8 LBL1 Logo1 Logo2 Logo3 Logo4 LOGO5 LOGO6 ZZ1 ZZ2 ZZ3 ZZ4
component class FiducialMark: FID1 FID2 FID3
component class AssemblyNote: ZZ1 ZZ2 ZZ3 ZZ4
component class Label: LBL1

## Components (designator, comment, footprint, x,y, rotation, side; value= is the part's Value field where it differs from the comment)
C7 "CGA3E2X7R1E104K080AA" 0603 76.15,102.782 r0 top value=0.1uF
C16 "GRM1885C1H301JA01D" 0603 93.5,57 r180 top value=300pF
C17 "GRM1885C1H301JA01D" 0603 231.4,39.8 r270 top value=300pF
C18 "CGA3E2X7R1E104K080AA" 0603 76.65,83.3 r0 top value=0.1uF
C19 "CGA3E2X7R1E104K080AA" 0603 94.545,72.054 r270 top value=0.1uF
C20 "GRM185R61C105KE44D" 0603 80.5,99.582 r270 top value=1uF
C21 "GRM1885C1H101JA01D" 0603 73.45,99.582 r270 top value=100pF
C22 "CGA3E2X7R1E104K080AA" 0603 241.55,42.05 r270 top value=0.1uF
C23 "GRM1885C1H101JA01D" 0603 76.3,99.582 r270 top value=100pF
C24 "GRM1885C1H220JA01D" 0603 71.925,98.1 r270 top value=22pF
C25 "GRM32EC72A106KE05L" FP-GRM32EC72A106KE05L_1210-MFG 67.8,82.1 r0 top
C26 "GRM32EC72A106KE05L" FP-GRM32EC72A106KE05L_1210-MFG 67.8,97.1 r0 top
C27 "CGA3E2X7R1E104K080AA" 0603 77.5,100.298 r180 bottom value=0.1uF
C28 "CGA3E2X7R1E104K080AA" 0603 63.8,33.8 r270 top value=0.1uF
C29 "GRM185R61C105KE44D" 0603 80.7,80.1 r270 top value=1uF
C30 "GRM1885C1H101JA01D" 0603 75.1,80.1 r270 top value=100pF
C31 "CGA3E2X7R1E104K080AA" 0603 105.525,31.2 r0 top value=0.1uF
C32 "GRM1885C1H101JA01D" 0603 77.875,80.1 r270 top value=100pF
C33 "GRM32EC72A106KE05L" FP-GRM32EC72A106KE05L_1210-MFG 67.8,94.1 r0 top
C34 "GRM32EC72A106KE05L" FP-GRM32EC72A106KE05L_1210-MFG 67.8,115.1 r0 top
C35 "GRM32EC72A106KE05L" FP-GRM32EC72A106KE05L_1210-MFG 67.8,91.1 r0 top
C36 "GRM32EC72A106KE05L" FP-GRM32EC72A106KE05L_1210-MFG 67.8,88.1 r0 top
C37 "GRM32EC72A106KE05L" FP-GRM32EC72A106KE05L_1210-MFG 67.8,85.1 r0 top
C38 "GRM1885C1H301JA01D" 0603 111.5,51.5 r90 top value=300pF
C39 "GRM1885C1H301JA01D" 0603 107.8,36.7 r270 top value=300pF
C40 "GRM32EC72A106KE05L" FP-GRM32EC72A106KE05L_1210-MFG 67.8,112.1 r0 top
C41 "GRM32EC72A106KE05L" FP-GRM32EC72A106KE05L_1210-MFG 67.8,109.1 r0 top
C42 "GRM32EC72A106KE05L" FP-GRM32EC72A106KE05L_1210-MFG 67.8,106.1 r0 top
C43 "GRM32EC72A106KE05L" FP-GRM32EC72A106KE05L_1210-MFG 67.8,103.1 r0 top
C44 "GRM32EC72A106KE05L" FP-GRM32EC72A106KE05L_1210-MFG 67.8,100.1 r0 top
C45 "CGA3E2X7R1E104K080AA" 0603 128.6,34.4 r270 top value=0.1uF
C46 "CGA3E2X7R1E104K080AA" 0603 274.5,63.7 r270 top value=0.1uF
C47 "GRM32EC72A106KE05L" FP-GRM32EC72A106KE05L_1210-MFG 93.782,106.175 r180 top
C48 "GRM32EC72A106KE05L" FP-GRM32EC72A106KE05L_1210-MFG 93.782,109.175 r180 top
C49 "GRM32EC72A106KE05L" FP-GRM32EC72A106KE05L_1210-MFG 93.782,112.175 r180 top
C50 "GRM32EC72A106KE05L" FP-GRM32EC72A106KE05L_1210-MFG 93.782,115.175 r180 top
C51 "GRM32EC72A106KE05L" FP-GRM32EC72A106KE05L_1210-MFG 93.8,118.175 r180 top
C52 "GRM32EC72A106KE05L" FP-GRM32EC72A106KE05L_1210-MFG 93.8,91.175 r180 top
C53 "C4532X7T2E105K250KA" FP-C4532X7T2E105K250KA_1812-MFG 235.95,66.262 r0 top value=1µF
C54 "C4532X7T2E105K250KA" FP-C4532X7T2E105K250KA_1812-MFG 245.65,62.452 r0 top value=1µF
C55 "GRM32EC72A106KE05L" FP-GRM32EC72A106KE05L_1210-MFG 93.782,94.175 r180 top
C56 "GRM32EC72A106KE05L" FP-GRM32EC72A106KE05L_1210-MFG 93.782,97.175 r180 top
C57 "C4532X7T2E105K250KA" FP-C4532X7T2E105K250KA_1812-MFG 235.95,70.017 r0 top value=1µF
C58 "C4532X7T2E105K250KA" FP-C4532X7T2E105K250KA_1812-MFG 245.65,66.207 r0 top value=1µF
C59 "GRM32EC72A106KE05L" FP-GRM32EC72A106KE05L_1210-MFG 93.782,100.175 r180 top
C60 "GRM32EC72A106KE05L" FP-GRM32EC72A106KE05L_1210-MFG 93.782,103.175 r180 top
C61 "C4532X7T2E105K250KA" FP-C4532X7T2E105K250KA_1812-MFG 235.95,73.772 r0 top value=1µF
C62 "C4532X7T2E105K250KA" FP-C4532X7T2E105K250KA_1812-MFG 245.65,69.963 r0 top value=1µF
C63 "C4532X7T2E105K250KA" FP-C4532X7T2E105K250KA_1812-MFG 235.95,81.283 r0 top value=1µF
C64 "C4532X7T2E105K250KA" FP-C4532X7T2E105K250KA_1812-MFG 245.65,73.718 r0 top value=1µF
C65 "C4532X7T2E105K250KA" FP-C4532X7T2E105K250KA_1812-MFG 235.95,62.506 r0 top value=1µF
C66 "C4532X7T2E105K250KA" FP-C4532X7T2E105K250KA_1812-MFG 245.65,77.473 r0 top value=1µF
C67 "C4532X7T2E105K250KA" FP-C4532X7T2E105K250KA_1812-MFG 235.95,77.528 r0 top value=1µF
C68 "C4532X7T2E105K250KA" FP-C4532X7T2E105K250KA_1812-MFG 245.65,81.229 r0 top value=1µF
C69 "CGA3E2X7R1E104K080AA" 0603 247,39.1 r0 top value=0.1uF
C70 "GRM32EC72A106KE05L" FP-GRM32EC72A106KE05L_1210-MFG 67.8,100.1 r0 bottom
C71 "GRM32EC72A106KE05L" FP-GRM32EC72A106KE05L_1210-MFG 67.8,91.1 r0 bottom
C72 "GRM32EC72A106KE05L" FP-GRM32EC72A106KE05L_1210-MFG 67.8,88.1 r0 bottom
C73 "GRM31CR71A226KE15L" 1206_180 275.83,59.5 r180 top value=22uF
C74 "GRM32EC72A106KE05L" FP-GRM32EC72A106KE05L_1210-MFG 67.8,82.1 r0 bottom
C75 "GRM1885C1H301JA01D" 0603 75.1,99.8 r90 bottom value=300pF
C76 "GRM32EC72A106KE05L" FP-GRM32EC72A106KE05L_1210-MFG 67.8,115.1 r0 bottom
C77 "GRM32EC72A106KE05L" FP-GRM32EC72A106KE05L_1210-MFG 67.8,112.1 r0 bottom
C78 "GRM32EC72A106KE05L" FP-GRM32EC72A106KE05L_1210-MFG 67.8,109.1 r0 bottom
C79 "GRM32EC72A106KE05L" FP-GRM32EC72A106KE05L_1210-MFG 67.8,106.1 r0 bottom
C81 "63ZLJ2700M18X40" FP-63ZLJ2700M18X40_RADIAL-MFG 57,30 r90 top locked value=2.7mF
C82 "63ZLJ2700M18X40" FP-63ZLJ2700M18X40_RADIAL-MFG 57,50 r90 top locked value=2.7mF
C83 "63ZLJ2700M18X40" FP-63ZLJ2700M18X40_RADIAL-MFG 57,70 r90 top locked value=2.7mF
C84 "63ZLJ2700M18X40" FP-63ZLJ2700M18X40_RADIAL-MFG 57,90 r90 top locked value=2.7mF
C85 "63ZLJ2700M18X40" FP-63ZLJ2700M18X40_RADIAL-MFG 57,110 r90 top locked value=2.7mF
C87 "GRM1885C1H301JA01D" 0603 61.4,36.1 r180 top value=300pF
C88 "GRM188R72A104KA35J" FP-GRM188R72A104KA35J_0603-MFG 76.6,108.244 r0 top value=100nF
C89 "GRM1885C1H222JA01D" 0603 61.5,32.2 r0 top value=2200pF
C90 "GRM1885C1H301JA01D" 0603 61.4,37.6 r0 top value=300pF
C91 "GRM1885C1H561JA01D" 0603 99.5,29.675 r270 top value=560pF
C92 "GRM1885C1H301JA01D" 0603 101.9,32.6 r180 top value=300pF
C93 "GRM1885C1H561JA01D" 0603 98.1,26.4 r90 top value=560pF
C94 "GRM1885C1H301JA01D" 0603 109.5,29.9 r0 top value=300pF
C95 "CGA3E2X7R1E104K080AA" 0603 109.5,28.5 r180 top value=0.1uF
C96 "GRM188R72A104KA35J" FP-GRM188R72A104KA35J_0603-MFG 76.6,107.019 r0 top value=100nF
C97 "GRM1885C1H301JA01D" 0603 271.7,63.7 r270 top value=300pF
C98 "GRM32EC72A106KE05L" FP-GRM32EC72A106KE05L_1210-MFG 81.1,56.8 r180 top
C99 "GRM188R72A104KA35J" FP-GRM188R72A104KA35J_0603-MFG 76.8,87.537 r0 top value=100nF
C100 "C0603C222K5RAC" 0603 79.3,69.4 r180 top value=2200pF
C101 "GRM188R72A104KA35J" FP-GRM188R72A104KA35J_0603-MFG 76.8,88.724 r0 top value=100nF
C102 "GRM31CR71A226KE15L" 1206_180 66.3,73.5 r180 top value=22uF
C103 "GRM185R61C105KE44D" 0603 131.2,34.5 r90 top value=1uF
C104 "GRM188R72A122KA01D" 0603 71.1,73.2 r0 top value=1200pF
C105 "GRM1885C2A560JA01D" 0603 79.3,71.4 r0 top value=56pF
C106 "GRM1885C1H102JA01D" 0603 96.1,51.5 r90 top value=1000pF
C107 "GRM1885C1H102JA01D" 0603 114.3,51.5 r270 top value=1000pF
C108 "GRM1885C1H102JA01D" 0603 115.7,51.5 r270 top value=1000pF
C109 "GRM1885C1H102JA01D" 0603 117.1,51.5 r270 top value=1000pF
C110 "GRM1885C1H220JA01D" 0603 83.5,51.5 r90 top value=22pF
C111 "GRM1885C1H220JA01D" 0603 86.3,51.5 r90 top value=22pF
C112 "GRM1885C1H102JA01D" 0603 111.05,36.8 r270 top value=1000pF
C113 "GRM1885C1H102JA01D" 0603 107.3,51.5 r90 top value=1000pF
C114 "GRM1885C1H102JA01D" 0603 112.9,51.5 r90 top value=1000pF
C115 "GRM1885C1H102JA01D" 0603 108.7,51.5 r90 top value=1000pF
C116 "GRM1885C1H102JA01D" 0603 110.1,51.5 r90 top value=1000pF
C117 "GRM1885C1H102JA01D" 0603 93.3,51.5 r90 top value=1000pF
C118 "GRM1885C1H102JA01D" 0603 98.9,51.5 r90 top value=1000pF
C119 "GRM1885C1H102JA01D" 0603 90.5,51.5 r90 top value=1000pF
C120 "GRM1885C1H220JA01D" 0603 80.7,51.5 r90 top value=22pF
C121 "GRM1885C1H220JA01D" 0603 89.1,51.5 r90 top value=22pF
C122 "GRM1885C1H220JA01D" 0603 69.3,51.5 r90 top value=22pF
C123 "GRM1885C1H220JA01D" 0603 72.1,51.5 r90 top value=22pF
C124 "GRM1885C1H220JA01D" 0603 74.9,51.5 r90 top value=22pF
C125 "GRM1885C1H220JA01D" 0603 77.7,51.5 r90 top value=22pF
C127 "GRM188R72A104KA35J" FP-GRM188R72A104KA35J_0603-MFG 76.6,109.444 r0 top value=100nF
C128 "DE6E3KJ222MN3A" E_900x700x900 260.8,96.7 r0 top value=2200pF
C129 "DE6E3KJ222MN3A" E_900x700x900 260.9,88.8 r180 top value=2200pF
C130 "DE6E3KJ222MN3A" E_900x700x900 234.95,115.7 r180 top value=2200pF
C131 "DE6E3KJ222MN3A" E_900x700x900 244.95,115.7 r180 top value=2200pF
C132 "890324025034CS" WCAP-FTX2_L18W8.5H14.5_CS 240,107.2 r0 top
C134 "GRM1885C1H561JA01D" 0603 255.2,41.2 r90 top value=560pF
C135 "GRM1885C1H301JA01D" 0603 247,40.5 r0 top value=300pF
C136 "GRM1885C1H561JA01D" 0603 247,44.7 r180 top value=560pF
C137 "GRM1885C1H301JA01D" 0603 247,43.3 r0 top value=300pF
C138 "GRM188R72A104KA35J" FP-GRM188R72A104KA35J_0603-MFG 80.2,59 r180 top value=100nF
C140 "GRM188R72A104KA35J" FP-GRM188R72A104KA35J_0603-MFG 76.8,89.937 r0 top value=100nF
D4 "APT1608MGC" APT1608_Green 152.1,36 r270 top value=Green
D5 "APT1608SYCK" APT1608_Yellow 150.3,36 r270 top value=Yellow
D6 "BAT54AWT-TP" SOT-323 144.9,43.5 r90 top value=30V
D7 "BAT54AWT-TP" SOT-323 136.2,43.5 r90 top value=30V
D8 "BAT54AWT-TP" SOT-323 139.1,43.5 r90 top value=30V
D9 "BAT54AWT-TP" SOT-323 142,43.5 r90 top value=30V
D10 "APG1608SURKC/T" FP-APG1608SURKC_T_0603-MFG 154,35.9 r270 top
D11 "BAT54AWT-TP" SOT-323 147.7,43.7 r90 top value=30V
D12 "BAT54AWT-TP" SOT-323 133.9,34.304 r90 top value=30V
F1 "36916300000" FP-36916300000_RADIAL-MFG 276.7,40.8 r270 top
F2 "36916300000" FP-36916300000_RADIAL-MFG 271.9,40.8 r270 top
FID1 "Fiducial" Fiducial10-20 279,118 r0 top
FID2 "Fiducial" Fiducial10-20 3,31 r0 top
FID3 "Fiducial" Fiducial10-20 288,31 r0 top
H1 "NY PMS 440 0025 PH" "NY PMS 440 0025 PH" 5,115 r0 top
H2 "NY PMS 440 0025 PH" "NY PMS 440 0025 PH" 285,115 r0 top
H3 "NY PMS 440 0025 PH" "NY PMS 440 0025 PH" 5,25 r0 top
H4 "NY PMS 440 0025 PH" "NY PMS 440 0025 PH" 285,25.08 r0 top
H5 "1902C" Keystone_1902C 5,115 r180 bottom
H6 "1902C" Keystone_1902C 285,115 r180 bottom
H7 "1902C" Keystone_1902C 5,25 r180 bottom
H8 "1902C" Keystone_1902C 285,25.08 r180 bottom
J1 "FCR7350R" Cliff_FCR7350R 84.08,29.36 r0 top
J2 "FCR7350L" FP-FCR7350L_CONN_BANANA_JACK-MFG 273,19 r90 top
J3 "FCR7350B" Cliff_FCR7350B 71.08,29.36 r0 top
J4 "FCR7350B" Cliff_FCR7350B 260,30 r0 top
J5 "FCR7350G" FP-FCR7350G_CONN_BANANA_JACK-MFG 247,19 r90 top
J6 "TSW-112-07-G-S" TSW-112-07-G-S 114.7,22.3 r180 top
J7 "22284023" Molex_0022284023 65.8,57.3 r180 top
J8 "22284023" Molex_0022284023 71.5,57.3 r0 top
J9 "694106402002" FP-694106402002_CONN_PWR_10MM7_9MM0-MFG 120.6,30.3 r0 top
J10 "HSEC8-160-01-L-DV-A-BL" controlCARD-120HSEC 97.343,43.922 r180 top
J11 "TSW-110-07-G-S" TSW-110-07-G-S 143.73,22.2 r180 top
L3 "7443081030" WE-HCM_1078_L9.4W6.2H7.8 77.7,116.3 r180 top
L4 "750371976r00" FP-750371976r00_XFRMR_22MM0_22MM0-MFG 187.9,94.172 r225 top value=3uH
L5 "B181125V0" FP-B181125V0_PTH_IND_41MM45_35MM1-MFG 189.6,98.725 r90 top value=5uH
L6 "LQM21PN2R2MGS" 0805_HV 76.5,57.9 r0 top value=2.2uH
L7 "SRR1210-330M" SRR1210 70.47,65.629 r180 top value=33uH
L8 "7443551221" FP-7443551221_SMD_IND_12MM8_12MM8-MFG 248,93.2 r180 top value=22uH
L9 "7448025003" FP-7448025003_PTH_COMMON_CHOKE-MFG 258.1,110.05 r270 top
L10 "7443551221" FP-7443551221_SMD_IND_12MM8_12MM8-MFG 234,93.2 r180 top value=22uH
LBL1 "THT-14-423-10" Label_650x200 5.6,70.3 r270 top
Logo1 "CE Mark" CE_Mark_5mm 196.2,37.4 r0 top
Logo2 "Texas Instruments" TI_Stacked_Overlay_Small 177,25.9 r0 top
Logo3 "FCC disclaimer" FCC_disclaimer 337.1,97.2 r270 top
Logo4 "WEEE logo" WEEE_Minimum 162.1,40.1 r0 top
LOGO5 "CAUTION HOT SURFACE" IEC_HotSurface_Small 225.3,81.1 r0 top
LOGO6 "DANGER HIGH VOLTAGE" IEC_HighVoltage_Small 263.5,40.783 r0 top
NT1 "Net-Tie" Net-Tie_50milWide_30milLong 79.2,94.3 r0 bottom net-tie
R15 "RC0603FR-0751RL" 0603 74.9,99.607 r90 top value=51.0
R16 "RC0603JR-070RL" 0603 79.06,99.582 r90 top value=0
R17 "RC0603FR-0710KL" 0603 74.2,97.282 r0 top value=10.0k
R18 "RC0603JR-070RL" 0603 76.15,104.182 r0 top value=0
R19 "RC0603JR-072KL" 0603 73.9,103.532 r270 top value=2.0k
R20 "RC0603JR-072KL" 0603 72.5,103.544 r270 top value=2.0k
R21 "RC0603FR-0751RL" 0603 77.675,99.582 r90 top value=51.0
R22 "RC0603JR-072KL" 0603 82.9,99.582 r270 top value=2.0k
R23 "RC0603JR-072KL" 0603 84.3,99.582 r270 top value=2.0k
R24 "RC0603FR-0710KL" 0603 77.25,97.382 r0 top value=10.0k
R25 "RC0603FR-074K7L" 0603 63,51.5 r180 top value=4.70k
R26 "RC0603JR-070RL" 0603 79.26,80.1 r90 top value=0
R27 "RC0603FR-0751RL" 0603 73.65,80.1 r90 top value=51.0
R28 "RC0603FR-0710KL" 0603 74.3,77.9 r180 top value=10.0k
R29 "RC0603JR-070RL" 0603 76.65,84.7 r0 top value=0
R30 "RC0603JR-072KL" 0603 74.4,84.05 r270 top value=2.0k
R31 "RC0603JR-072KL" 0603 73,84.05 r270 top value=2.0k
R32 "RC0603FR-0751RL" 0603 76.5,80.1 r90 top value=51.0
R33 "RC0603JR-072KL" 0603 83.1,80.1 r270 top value=2.0k
R34 "RC0603JR-072KL" 0603 84.5,80.1 r270 top value=2.0k
R35 "RC0603FR-0710KL" 0603 77.4,77.9 r180 top value=10.0k
R36 "RC0603FR-07300RL" 0603 233.6,40.6 r180 top value=300
R37 "RC0603FR-07300RL" 0603 93.5,55.6 r0 top value=300
R38 "ERJP08D4993V" FP-ERJP08D4993V_1206-MFG 257.2,82.7 r180 top value=499k
R39 "RC0603FR-075K6L" 0603 92.1,72.854 r180 top value=5.60k
R40 "RC0603FR-071KL" 0603 87.391,72.854 r0 top value=1.00k
R41 "RC0603FR-075K6L" 0603 238.175,39.8 r270 top value=5.60k
R42 "RC0603FR-071KL" 0603 236.8,39.8 r90 top value=1.00k
R43 "RC0603FR-07300RL" 0603 77.5,98.898 r0 bottom value=300
R44 "CRF1206-FZ-R001ELF" 1206 61.5,27 r180 top value=0.001
R45 "RC0603JR-07360RL" 0603 60.5,30 r90 top value=360
R46 "RC0603FR-07300RL" 0603 59.2,36.8 r270 top value=300
R47 "RC0603JR-07360RL" 0603 62.5,30 r90 top value=360
R48 "RT0603BRD07100KL" 0603 95.6,30.2 r0 top value=100k
R49 "RT0603BRD075K11L" 0603 98.1,29.675 r90 top value=5.11k
R50 "RC0603FR-07300RL" 0603 101.875,31.2 r180 top value=300
R51 "RT0805BRD07100KL" 0805_HV 95,28.1 r0 top value=100k
R52 "RT0603BRD075K11L" 0603 99.5,26.4 r270 top value=5.11k
R53 "RT0603BRD07100KL" 0603 109.5,25.7 r180 top value=100k
R54 "RC0603FR-07300RL" 0603 109.5,31.3 r180 top value=300
R55 "RT0603BRD07100KL" 0603 109.5,27.1 r0 top value=100k
R56 "RC0603FR-07316KL" 0603 82.475,70.3 r90 top value=316k
R57 "RC0603FR-07100KL" 0603 126.7,30.9 r90 top value=100k
R58 "CRCW0805300KJNEA" 0805_HV 75,73.5 r180 top value=300k
R59 "RC0603FR-07100KL" 0603 83.9,70.3 r270 top value=100k
R60 "RC0603FR-0742K2L" 0603 85.7,61.4 r180 top value=42.2k
R61 "RC0603FR-07200KL" 0603 127.8,28 r180 top value=200k
R62 "RC0603FR-071K5L" 0603 152.1,40 r90 top value=1.50k
R63 "RC0603FR-073K3L" 0603 150.3,40 r90 top value=3.30k
R64 "RC0603FR-0751RL" 0603 143.625,40 r90 top value=51.0
R65 "RC0603JR-072KL" 0603 97.5,51.5 r90 top value=2.0k
R66 "RC0603FR-0751RL" 0603 145.25,40 r90 top value=51.0
R67 "RC0603FR-0751RL" 0603 135.5,40 r90 top value=51.0
R68 "RC0603JR-072KL" 0603 94.7,51.5 r90 top value=2.0k
R69 "RC0603FR-0751RL" 0603 137.125,40 r90 top value=51.0
R70 "RC0603FR-0751RL" 0603 138.75,40 r90 top value=51.0
R71 "RC0603FR-0751RL" 0603 140.375,40 r90 top value=51.0
R72 "RC0603FR-0751RL" 0603 142,40 r90 top value=51.0
R73 "RC0603JR-070RL" 0603 105.9,51.5 r270 top value=0
R74 "RC0603JR-070RL" 0603 104.5,51.5 r270 top value=0
R75 "RC0603JR-070RL" 0603 102.7,36.5 r270 top value=0
R76 "RC0603JR-070RL" 0603 103.1,51.5 r270 top value=0
R77 "RC0603JR-070RL" 0603 101.3,36.5 r270 top value=0
R78 "RC0603JR-070RL" 0603 101.7,51.5 r270 top value=0
R79 "RC0603JR-070RL" 0603 99.9,36.5 r270 top value=0
R80 "RC0603JR-070RL" 0603 100.3,51.5 r270 top value=0
R81 "RC0603JR-070RL" 0603 98.5,36.5 r270 top value=0
R82 "RC0603FR-07120RL" 0603 154,40 r90 top value=120
R83 "RC0603FR-0751RL" 0603 146.875,40 r90 top value=51.0
R84 "RC0603JR-072KL" 0603 91.9,51.5 r90 top value=2.0k
R85 "RC0603FR-0751RL" 0603 148.5,40 r90 top value=51.0
R86 "RC0603FR-0751RL" 0603 87.7,51.5 r270 top value=51.0
R87 "RC0603FR-0751RL" 0603 84.9,51.5 r270 top value=51.0
R88 "RC0603FR-0751RL" 0603 82.1,51.5 r270 top value=51.0
R89 "RC0603FR-0751RL" 0603 79.3,51.5 r270 top value=51.0
R90 "RC0603FR-0751RL" 0603 76.3,51.5 r270 top value=51.0
R91 "RC0603FR-0751RL" 0603 73.5,51.5 r270 top value=51.0
R92 "RC0603FR-0751RL" 0603 70.7,51.5 r270 top value=51.0
R93 "RC0603FR-0751RL" 0603 67.9,51.5 r270 top value=51.0
R94 "RC0603JR-070RL" 0603 66.5,51.5 r270 top value=0
R95 "IsoM3-275-B-L2" FP-IsoM3-275-B-L2_RADIAL-MFG 273.5,104.1 r180 top
R96 "IsoM3-275-B-L2" FP-IsoM3-275-B-L2_RADIAL-MFG 273.4,96.7 r0 top
R97 "ERJP08D4993V" FP-ERJP08D4993V_1206-MFG 263.1,82.7 r180 top value=499k
R98 "CRCW0805390KJNEA" 0805_HV 85.8,57.7 r180 top value=390k
R99 "IsoM3-275-B-L2" FP-IsoM3-275-B-L2_RADIAL-MFG 273.4,89.3 r180 top
R100 "RC0603FR-07100KL" 0603 85.7,60 r180 top value=100k
R101 "RC0603FR-07300RL" 0603 273.1,63.7 r90 top value=300
R102 "RC0603FR-071KL" 0603 277.6,63.7 r90 top value=1.00k
R103 "RC0603FR-075K6L" 0603 276.2,63.7 r270 top value=5.60k
R104 "RT0603BRD0712KL" 0603 253.8,41.2 r90 top value=12.0k
R105 "ERJP08D4993V" FP-ERJP08D4993V_1206-MFG 264.9,77.5 r270 top value=499k
R106 "ERJP08D4993V" FP-ERJP08D4993V_1206-MFG 263.1,72.4 r270 top value=499k
R107 "ERJP08D4993V" FP-ERJP08D4993V_1206-MFG 261.6,67.2 r270 top value=499k
R108 "ERJP08D4993V" FP-ERJP08D4993V_1206-MFG 261.6,62 r270 top value=499k
R109 "ERJP08D4993V" FP-ERJP08D4993V_1206-MFG 252.8,54.2 r270 top value=499k
R110 "ERJP08D4993V" FP-ERJP08D4993V_1206-MFG 252.6,48.8 r270 top value=499k
R111 "RC0603FR-0751RL" 0603 247,41.9 r180 top value=51.0
R112 "ERJP08D4993V" FP-ERJP08D4993V_1206-MFG 255.4,77.4 r270 top value=499k
R113 "ERJP08D4993V" FP-ERJP08D4993V_1206-MFG 257.2,72.4 r270 top value=499k
R114 "ERJP08D4993V" FP-ERJP08D4993V_1206-MFG 258.3,67.2 r270 top value=499k
R115 "ERJP08D4993V" FP-ERJP08D4993V_1206-MFG 258.3,62 r270 top value=499k
R116 "ERJP08D4993V" FP-ERJP08D4993V_1206-MFG 249.5,54 r270 top value=499k
R117 "ERJP08D4993V" FP-ERJP08D4993V_1206-MFG 249.5,48.8 r270 top value=499k
R118 "RT0603BRD0712KL" 0603 247,46.1 r0 top value=12.0k
R119 "RC0603FR-07300RL" 0603 270.3,63.7 r270 top value=300
S1A "XLMG3656R025KLAT" KLA0009A-MFG 170.159,70.918 r180 top (schematic designator A)
S1B "XLMG3656R025KLAT" KLA0009A-MFG 189.02,70.918 r0 top (schematic designator B)
S1C1 "GRM1885C1H301JA01D" 0603 179.676,42.001 r270 top value=300pF (schematic designator C1)
S1C2 "CGA3E2X7R1E104K080AA" 0603 178.251,42.001 r270 top value=0.1uF (schematic designator C2)
S1C3 "CGA3E2X7R1E104K080AA" 0603 181.631,70.318 r90 top value=0.1uF (schematic designator C3)
S1C4 "CGA3E2X7R1E104K080AA" 0603 177.459,71.518 r270 top value=0.1uF (schematic designator C4)
S1C5 "CGA3E2X7R1E104K080AA" 0603 177.536,60.669 r90 top value=0.1uF (schematic designator C5)
S1C6 "GRM1885C1H101JA01D" 0603 169.575,42.027 r180 top value=100pF (schematic designator C6)
S1C8 "GRM1885C1H101JA01D" 0603 169.575,44.79 r180 top value=100pF (schematic designator C8)
S1C9 "CGA3E2X7R1E104K080AA" 0603 190.136,59.869 r90 top value=0.1uF (schematic designator C9)
S1C10 "GRM21BZ71A226ME15L" 0805_HV 187.511,60.169 r180 top value=22uF (schematic designator C10)
S1C11 "885012205063" WCAP-CSGP_0402_L1W0.5H0.5 187.836,58.569 r0 top (schematic designator C11)
S1C12 "GRT31CR61H106KE01L" 1206_180 182.478,63.458 r90 top value=10uF (schematic designator C12)
S1C13 "885012205051" WCAP-CSGP_0402_L1W0.5H0.5 186.595,45.602 r180 top (schematic designator C13)
S1C14 "GRM21BZ71A226ME15L" 0805_HV 186.592,43.994 r0 top value=22uF (schematic designator C14)
S1C15 "GRM21BZ71A226ME15L" 0805_HV 186.608,41.494 r0 top value=22uF (schematic designator C15)
S1C86 "CGA3E2X7R1E104K080AA" 0603 176.826,42.001 r270 top value=0.1uF (schematic designator C86)
S1D1 "SMAJ440CA" SMA_Bi 170.7,106.3 r180 bottom value=440V (schematic designator D1)
S1D2 "APT1608SYCK" APT1608_Yellow 172.51,61.134 r270 top value=Yellow (schematic designator D2)
S1D3 "APG1608SURKC/T" FP-APG1608SURKC_T_0603-MFG 170.193,61.094 r90 top (schematic designator D3)
S1L1 "SDR0302-150ML" SDR0302 189.115,63.434 r270 top value=15uH (schematic designator L1)
S1L2 "74479763222" WE-PMI_0603_L1.6W0.8H0.8 183.911,42.667 r270 top (schematic designator L2)
S1R1 "RC0603FR-07300RL" 0603 181.103,42.001 r270 top value=300 (schematic designator R1)
S1R2 "THJP2512AST1" FP-THJP2512AST1_2512-MFG 165.936,67.959 r180 bottom (schematic designator R2)
S1R3 "THJP2512AST1" FP-THJP2512AST1_2512-MFG 193.036,67.959 r180 bottom (schematic designator R3)
S1R4 "RC0603FR-0751RL" 0603 171.793,42.001 r270 top value=51.0 (schematic designator R4)
S1R5 "RC0603FR-0710KL" 0603 169.575,40.601 r0 top value=10.0k (schematic designator R5)
S1R6 "RC0603FR-0751RL" 0603 173.237,42.001 r270 top value=51.0 (schematic designator R6)
S1R7 "RC0603FR-0710KL" 0603 169.575,43.394 r0 top value=10.0k (schematic designator R7)
S1R8 "RC0603FR-0710KL" 0603 170.193,64.169 r90 top value=10.0k (schematic designator R8)
S1R9 "RC0603FR-07270KL" 0603 182.836,60.069 r0 top value=270k (schematic designator R9)
S1R10 "RC0603FR-073K3L" 0603 172.51,64.169 r90 top value=3.30k (schematic designator R10)
S1R11 "RC0603FR-0718KL" 0603 182.5,44.4 r90 top value=18.0k (schematic designator R11)
S1R12 "RC0603FR-07787KL" 0603 179.736,61.469 r0 top value=787k (schematic designator R12)
S1R13 "RC0603FR-07100KL" 0603 179.736,60.069 r0 top value=100k (schematic designator R13)
S1R14 "RC0603FR-0771K5L" 0603 179.736,62.869 r0 top value=71.5k (schematic designator R14)
S1TP1 "5011" Keystone5011 167,61.919 r0 top (schematic designator TP1)
S1U1 "ISOTMP35BEDFQRQ1" DFQ0007A-MFG 181.359,54.618 r90 top (schematic designator U1)
S1U2 "ISO6762DWR" DW0016A-MFG 173.145,52.268 r270 top (schematic designator U2)
S1U3 "TLV61046ADBVR" DBV0006A_N 185.467,63.434 r270 top (schematic designator U3)
S1U4 "UCC33421-Q1" DWX0016A-MFG 187.234,52.318 r90 top (schematic designator U4)
S2A "XLMG3656R025KLAT" KLA0009A-MFG 205.986,70.872 r180 top (schematic designator A)
S2B "XLMG3656R025KLAT" KLA0009A-MFG 224.848,70.872 r0 top (schematic designator B)
S2C1 "GRM1885C1H301JA01D" 0603 215.504,41.956 r270 top value=300pF (schematic designator C1)
S2C2 "CGA3E2X7R1E104K080AA" 0603 214.079,41.956 r270 top value=0.1uF (schematic designator C2)
S2C3 "CGA3E2X7R1E104K080AA" 0603 217.459,70.272 r90 top value=0.1uF (schematic designator C3)
S2C4 "CGA3E2X7R1E104K080AA" 0603 213.286,71.472 r270 top value=0.1uF (schematic designator C4)
S2C5 "CGA3E2X7R1E104K080AA" 0603 213.364,60.623 r90 top value=0.1uF (schematic designator C5)
S2C6 "GRM1885C1H101JA01D" 0603 205.403,42.581 r180 top value=100pF (schematic designator C6)
S2C8 "GRM1885C1H101JA01D" 0603 205.403,45.345 r180 top value=100pF (schematic designator C8)
S2C9 "CGA3E2X7R1E104K080AA" 0603 225.964,59.823 r90 top value=0.1uF (schematic designator C9)
S2C10 "GRM21BZ71A226ME15L" 0805_HV 223.339,60.123 r180 top value=22uF (schematic designator C10)
S2C11 "885012205063" WCAP-CSGP_0402_L1W0.5H0.5 223.664,58.523 r0 top (schematic designator C11)
S2C12 "GRT31CR61H106KE01L" 1206_180 218.306,63.412 r90 top value=10uF (schematic designator C12)
S2C13 "885012205051" WCAP-CSGP_0402_L1W0.5H0.5 222.423,45.556 r180 top (schematic designator C13)
S2C14 "GRM21BZ71A226ME15L" 0805_HV 222.42,43.948 r0 top value=22uF (schematic designator C14)
S2C15 "GRM21BZ71A226ME15L" 0805_HV 222.436,41.448 r0 top value=22uF (schematic designator C15)
S2C86 "CGA3E2X7R1E104K080AA" 0603 212.654,41.956 r270 top value=0.1uF (schematic designator C86)
S2D1 "SMAJ440CA" SMA_Bi 219.6,106.7 r180 bottom value=440V (schematic designator D1)
S2D2 "APT1608SYCK" APT1608_Yellow 208.338,61.088 r270 top value=Yellow (schematic designator D2)
S2D3 "APG1608SURKC/T" FP-APG1608SURKC_T_0603-MFG 206.021,61.048 r90 top (schematic designator D3)
S2L1 "SDR0302-150ML" SDR0302 224.942,63.388 r270 top value=15uH (schematic designator L1)
S2L2 "74479763222" WE-PMI_0603_L1.6W0.8H0.8 219.739,42.622 r270 top (schematic designator L2)
S2R1 "RC0603FR-07300RL" 0603 216.931,41.956 r270 top value=300 (schematic designator R1)
S2R2 "THJP2512AST1" FP-THJP2512AST1_2512-MFG 201.764,67.913 r180 bottom (schematic designator R2)
S2R3 "THJP2512AST1" FP-THJP2512AST1_2512-MFG 228.864,67.913 r180 bottom (schematic designator R3)
S2R4 "RC0603FR-0751RL" 0603 207.62,41.956 r270 top value=51.0 (schematic designator R4)
S2R5 "RC0603FR-0710KL" 0603 205.403,41.156 r0 top value=10.0k (schematic designator R5)
S2R6 "RC0603FR-0751RL" 0603 209.065,41.956 r270 top value=51.0 (schematic designator R6)
S2R7 "RC0603FR-0710KL" 0603 205.403,43.948 r0 top value=10.0k (schematic designator R7)
S2R8 "RC0603FR-0710KL" 0603 206.021,64.123 r90 top value=10.0k (schematic designator R8)
S2R9 "RC0603FR-07270KL" 0603 218.664,60.023 r0 top value=270k (schematic designator R9)
S2R10 "RC0603FR-073K3L" 0603 208.338,64.123 r90 top value=3.30k (schematic designator R10)
S2R11 "RC0603FR-0718KL" 0603 218.3,44.1 r90 top value=18.0k (schematic designator R11)
S2R12 "RC0603FR-07787KL" 0603 215.564,61.423 r0 top value=787k (schematic designator R12)
S2R13 "RC0603FR-07100KL" 0603 215.564,60.023 r0 top value=100k (schematic designator R13)
S2R14 "RC0603FR-0771K5L" 0603 215.564,62.823 r0 top value=71.5k (schematic designator R14)
S2TP1 "5011" Keystone5011 202.8,61.919 r0 top (schematic designator TP1)
S2U1 "ISOTMP35BEDFQRQ1" DFQ0007A-MFG 217.186,54.572 r90 top (schematic designator U1)
S2U2 "ISO6762DWR" DW0016A-MFG 208.973,52.722 r270 top (schematic designator U2)
S2U3 "TLV61046ADBVR" DBV0006A_N 221.295,63.388 r270 top (schematic designator U3)
S2U4 "UCC33421-Q1" DWX0016A-MFG 223.061,52.272 r90 top (schematic designator U4)
T1 "B181134V1" FP-B181134V1_PTH_XFRMR_48MM0_50MM0-MFG 128.6,88.7 r270 top
T2 "750371975r00" FP-750371975r00_PTH_XFRMR_62MM7_62MM8-MFG 129,87.8 r0 top
TP2 "5010" Keystone5010 94,23 r0 top
TP3 "5127" Keystone5127 286.3,38.4 r0 top
TP4 "5011" Keystone5011 61,23 r0 top
TP5 "5011" Keystone5011 234.8,22.8 r0 top
TP6 "5011" Keystone5011 271.678,57.7 r0 top
TP7 "5011" Keystone5011 63.459,79.322 r0 top
TP8 "5011" Keystone5011 228.5,37.6 r90 top
TP9 "5011" Keystone5011 91.946,60.5 r90 top
TP10 "5011" Keystone5011 89.2,116.5 r0 top
TP11 "5011" Keystone5011 219.423,23.2 r0 top
TP12 "5011" Keystone5011 166.1,115.5 r90 top
TP13 "5011" Keystone5011 86.1,92.1 r90 top
TP14 "5011" Keystone5011 165.3,82.6 r90 top
TP15 "5011" Keystone5011 243.4,45.6 r0 top
TP16 "5011" Keystone5011 113.8,33.024 r0 top
TP18 "5011" Keystone5011 113.9,37.2 r0 top
TP25 "5011" Keystone5011 164,22.4 r0 top
TP26 "5011" Keystone5011 62.1,105.3 r90 top
TP27 "5011" Keystone5011 197.5,64 r90 top
U5 "XLMG2100R026VBNR" VBN0018A-MFG 81,106.882 r180 top
U6 "XLMG2100R026VBNR" VBN0018A-MFG 81.2,87.4 r180 top
U7 "TMCS1133B1QDVGR" DVG0010A-MFG 91.1,79.7 r270 top
U8 "TMCS1133B3QDVGR" DVG0010A-MFG 235.2,48.8 r270 top
U9 "TMP235DCK" DCK0005A_N 81.1,99.678 r180 bottom
U10 "INA185A3IDRLR" DRL0006A 61.4,34.1 r0 top
U11 "TLV9002IDGKR" DGK0008A_N 104.1,28.6 r0 top
U12 "LM5164DDAR" DDA0008E-MFG 80.57,64.129 r90 top
U13 "TLV77333PDBVR" DBV0005A-MFG 129.9,30.7 r0 top
U14 "TMCS1123B5QDVGR" DVG0010A-MFG 273.7,73.4 r270 top
U15 "TLV9002IDGKR" DGK0008A_N 250.9,41.3 r270 top
U16 "ESDS312DBVR" DBV0005A_N 254.9,44.6 r180 top
ZZ1 "This Assembly Note is for PCB labels only" AssemblyNoteLabel 2.949,153.775 r0 top